# Altium PCB RELIA.PcbDoc (part 1 of 3)
Units mm, origin at the board's own origin, x right, y up, seen from the top; angles counter-clockwise.
Board outline 64.01 x 60 mm, 4 copper layers (Top Layer, GND, POWER, Bottom Layer), stack 1.457 mm thick; 143 components, 99 nets, 570 pads, 325 vias.
Unrouted connection lines stored in the file: 1.
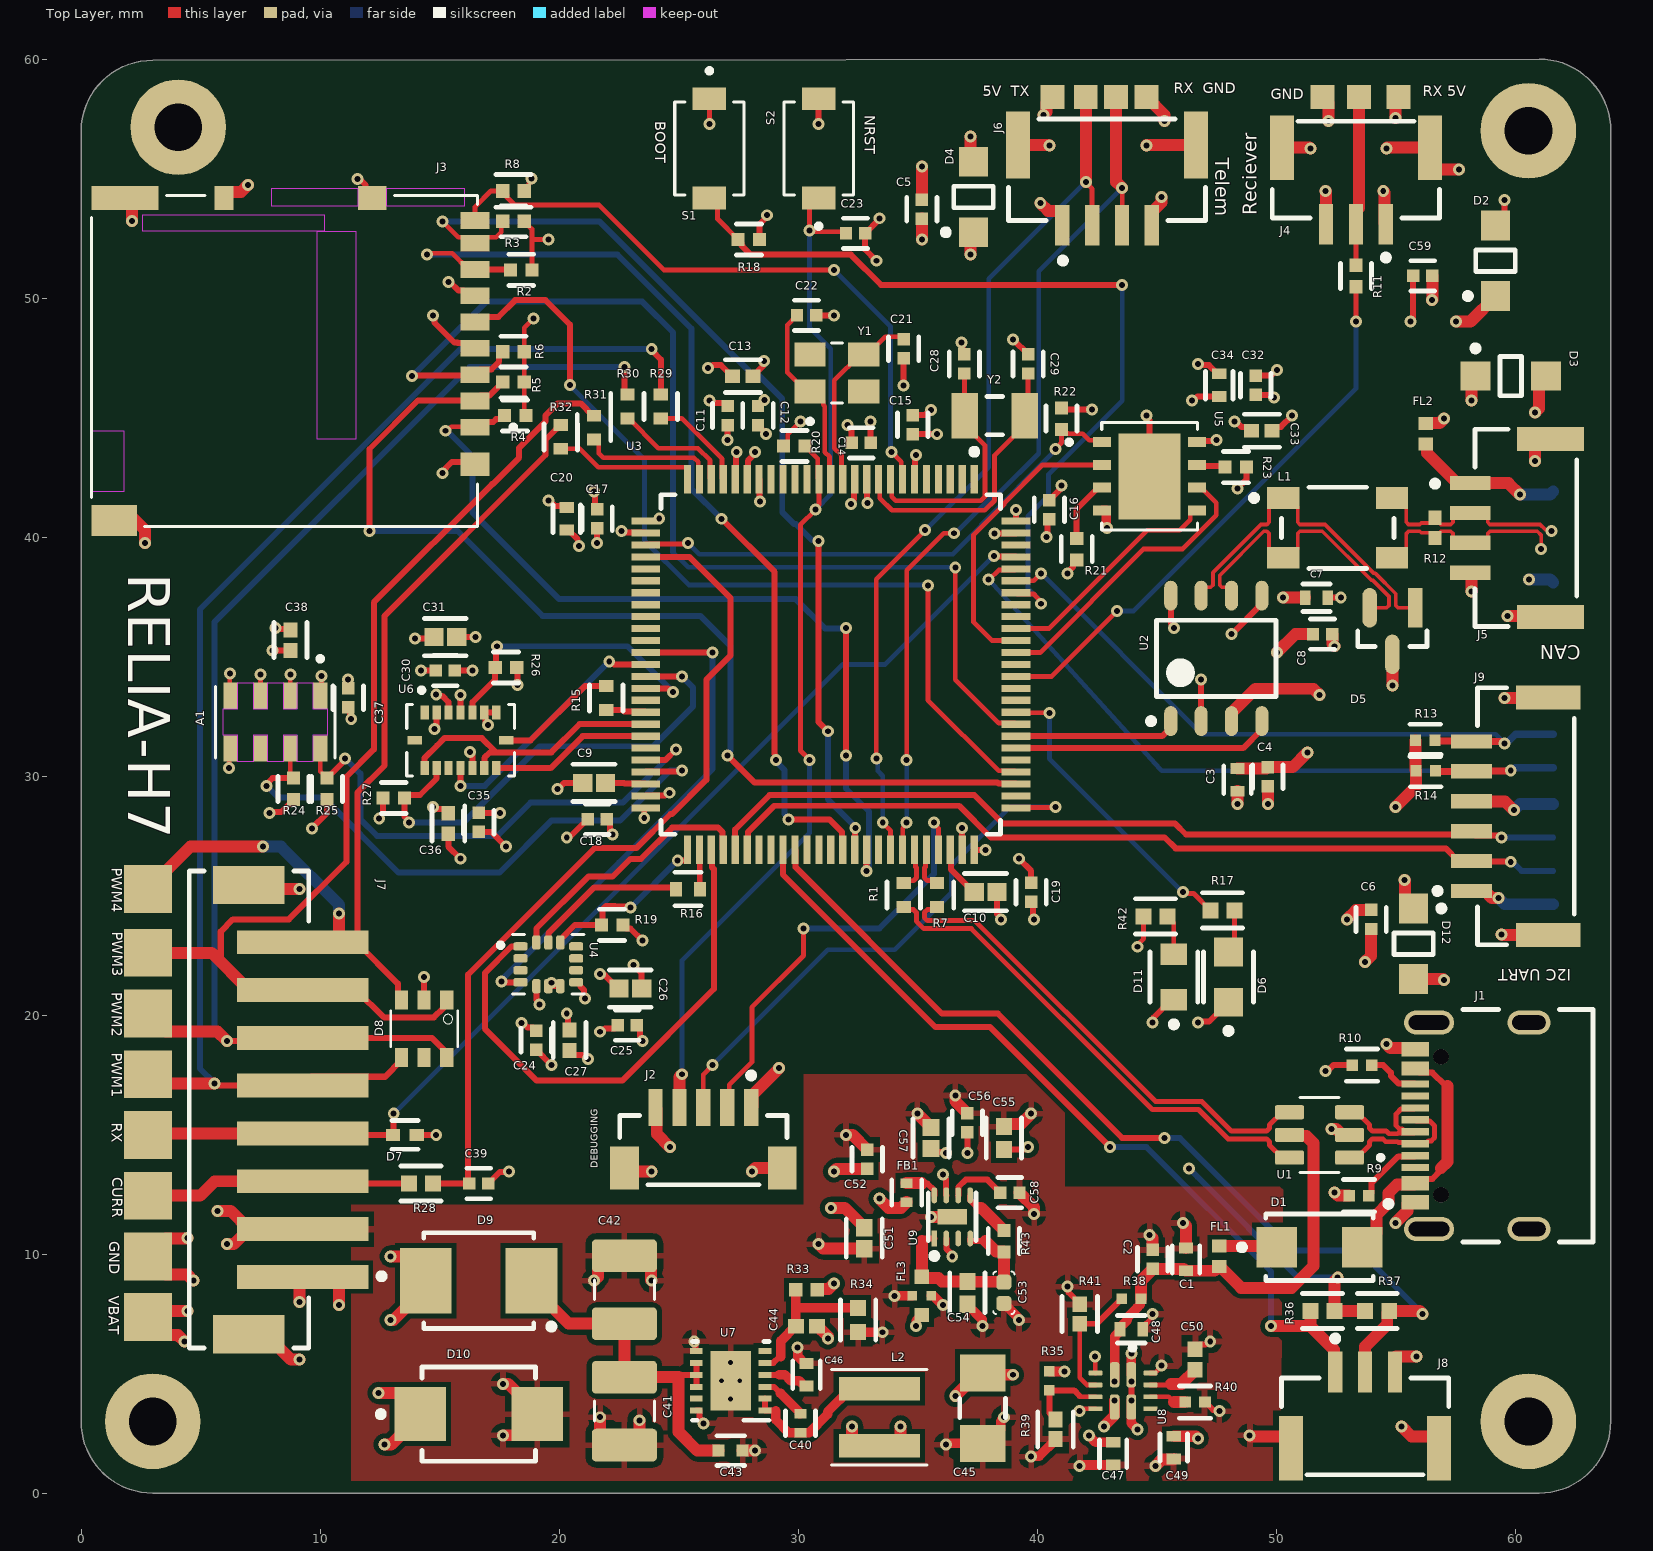
[diagram p0: Top Layer view]
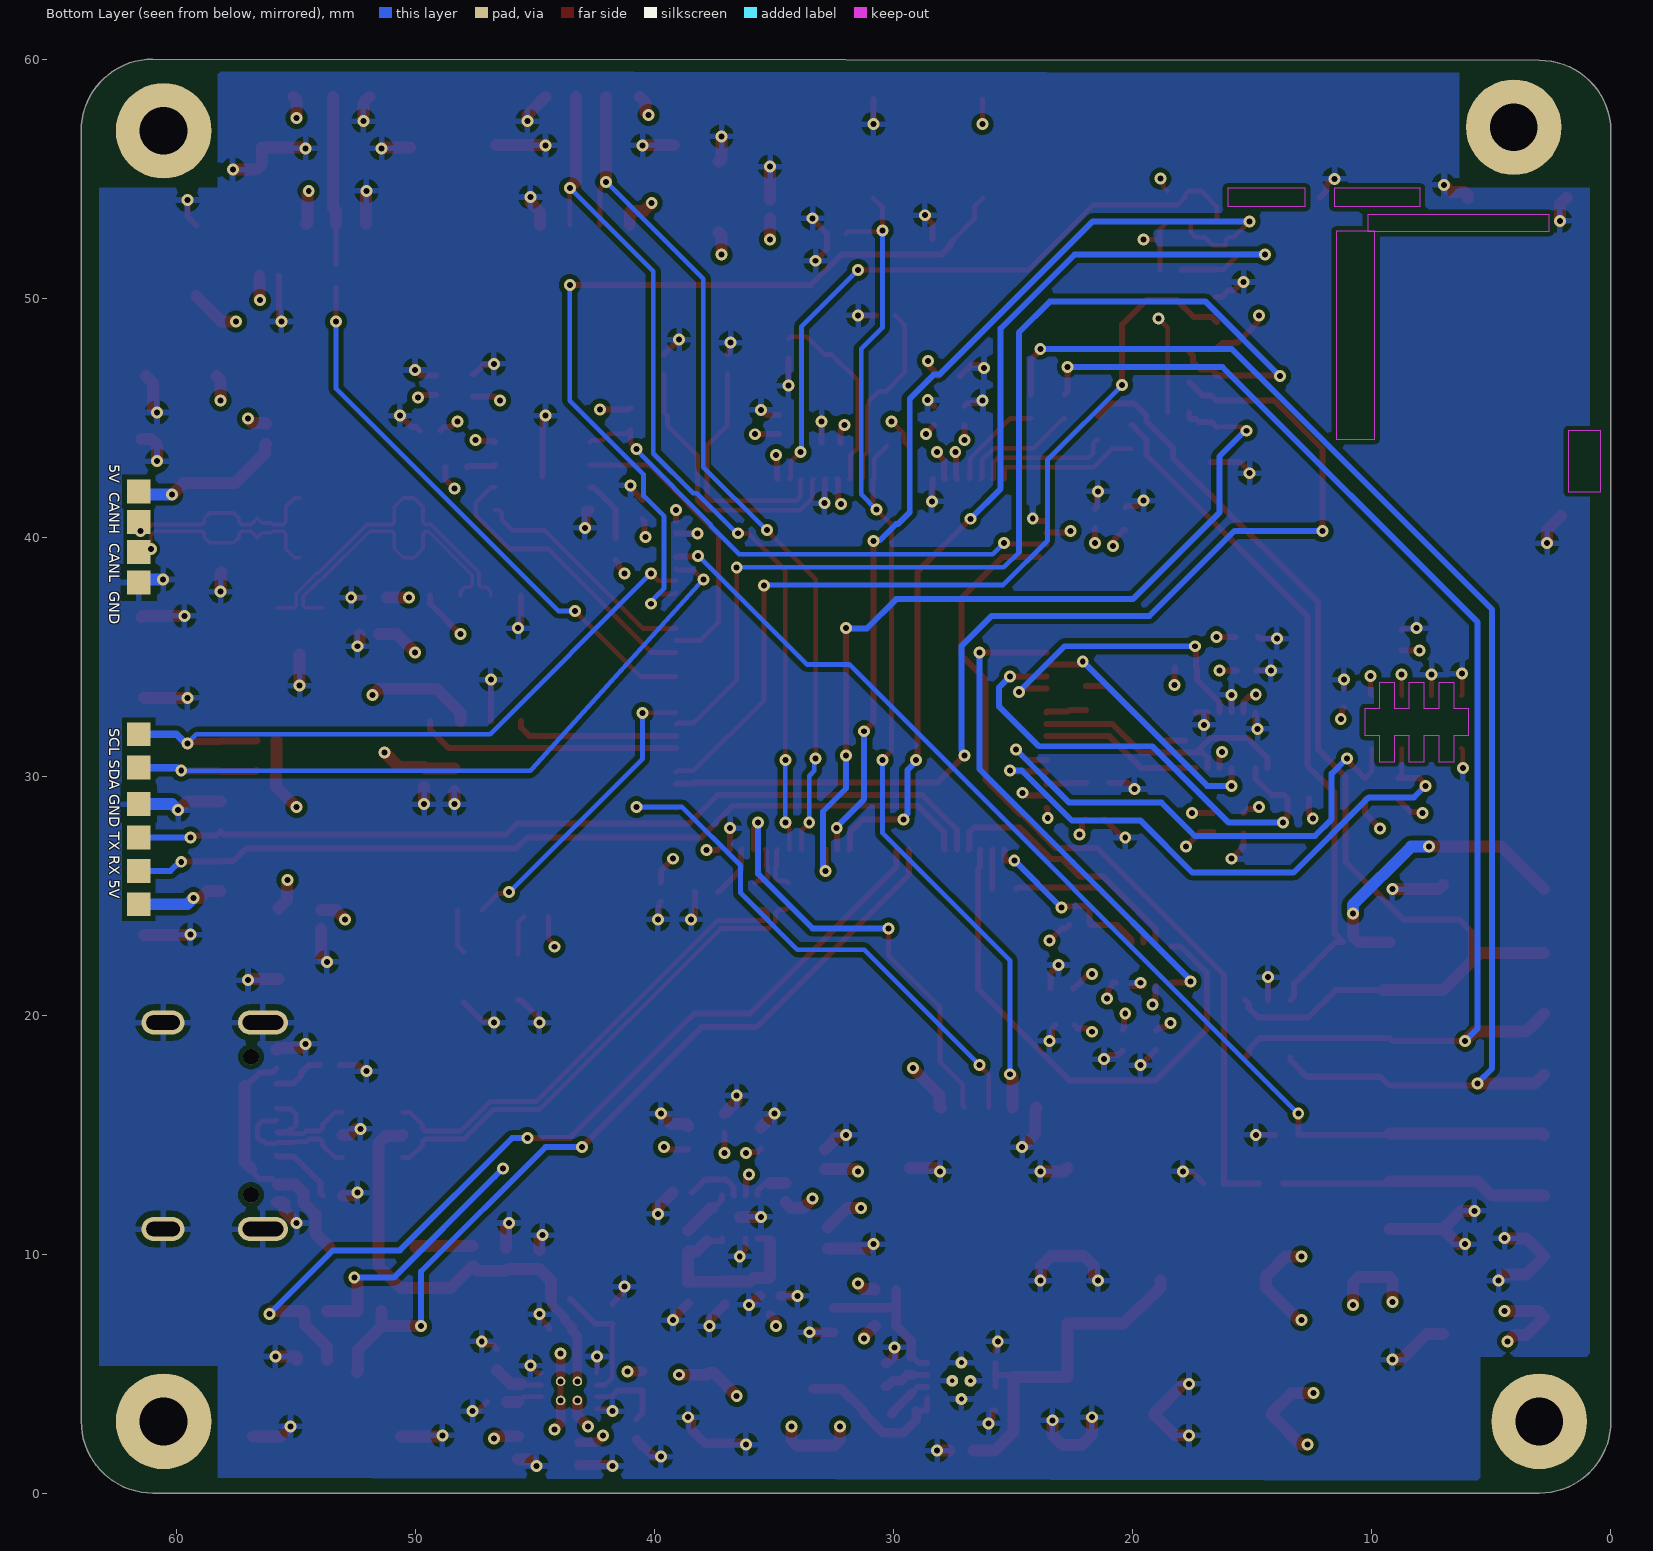
[diagram p1: Bottom Layer view, seen from below]
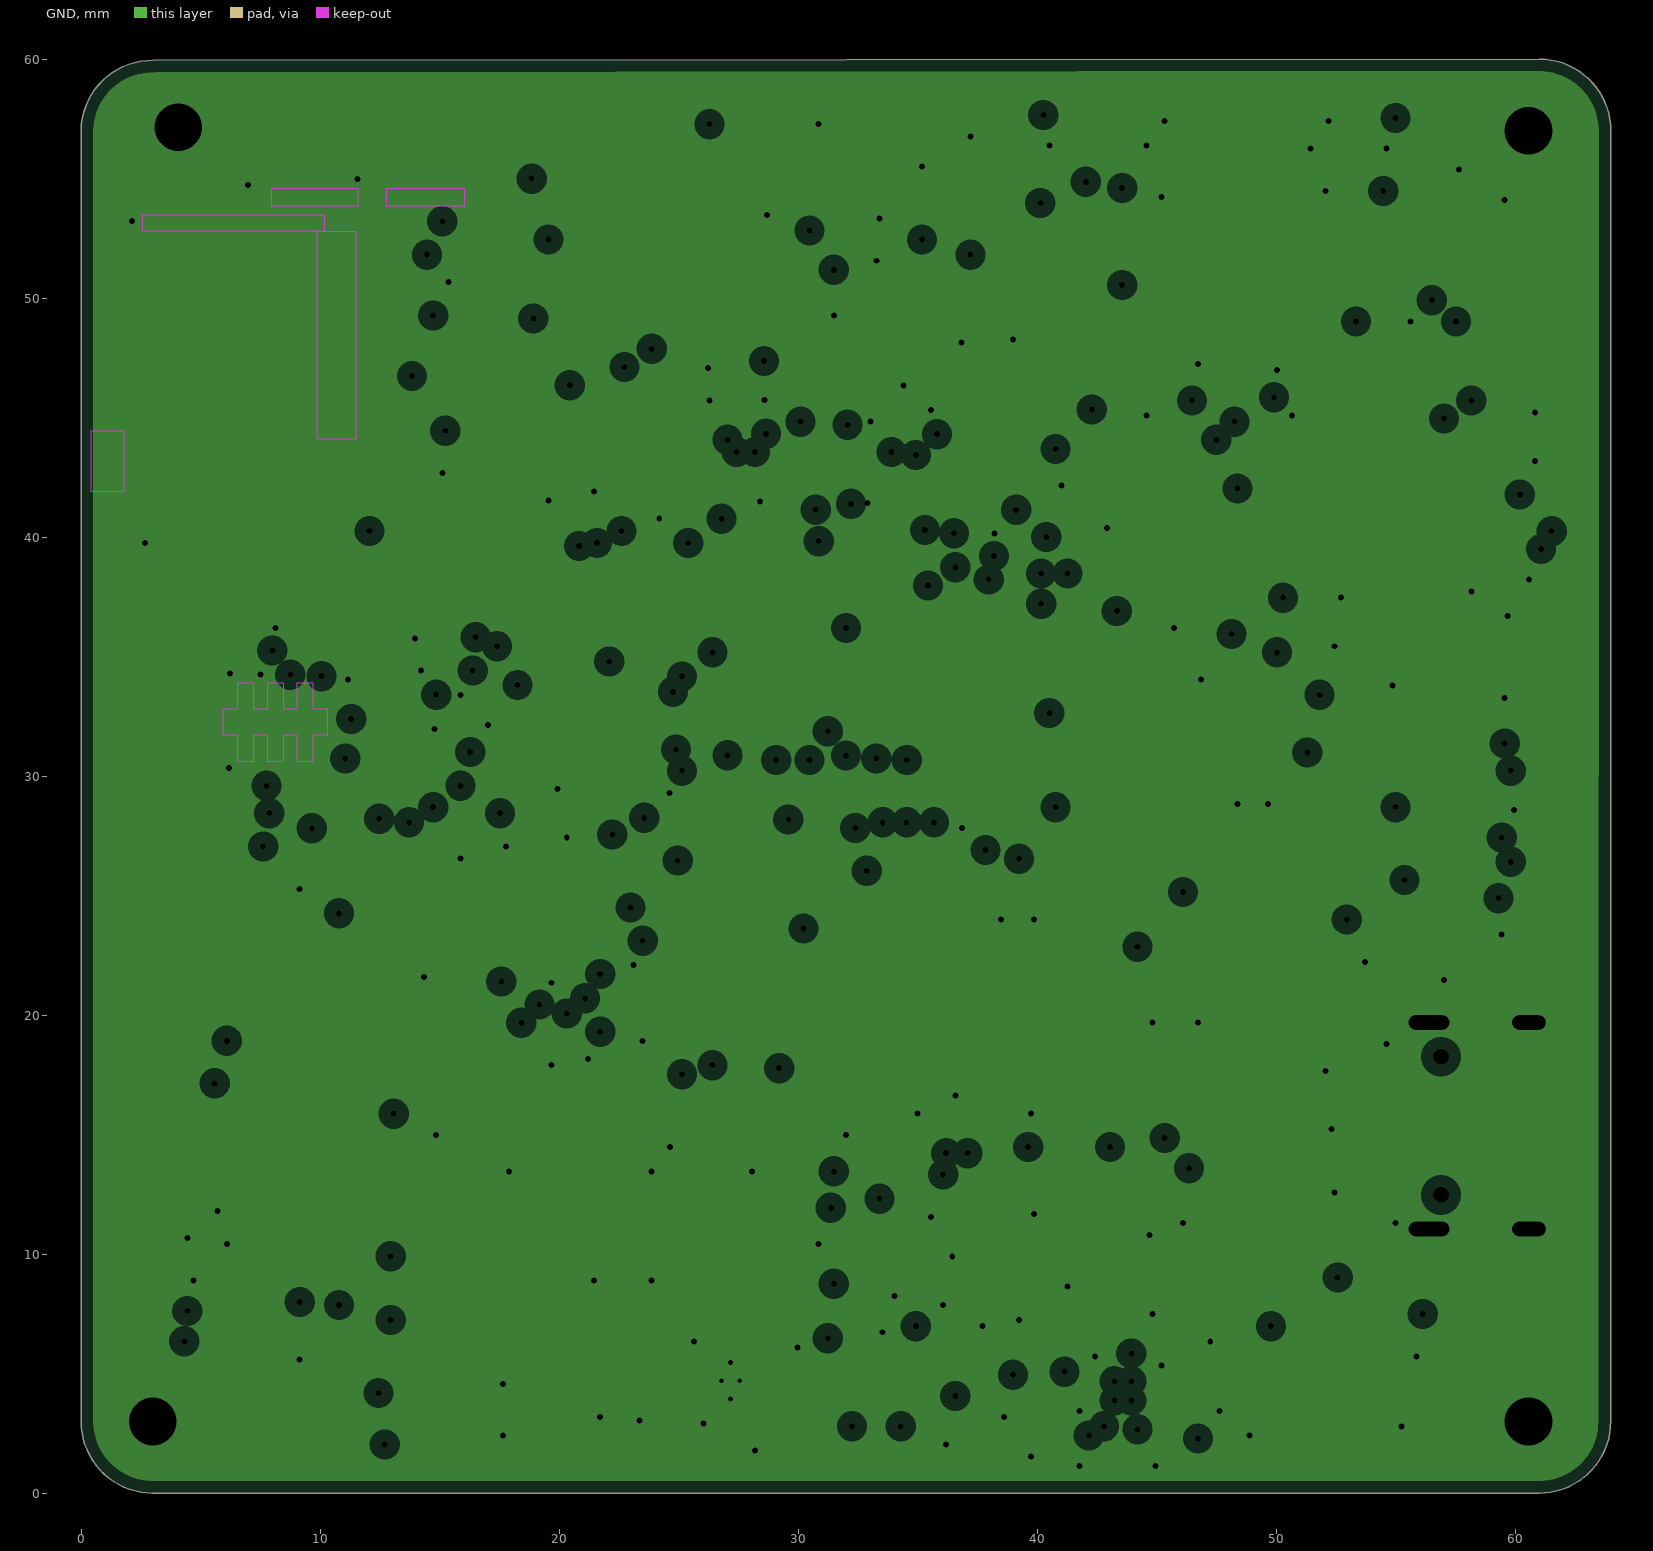
[diagram p2: GND, clearances drawn from the general rule]
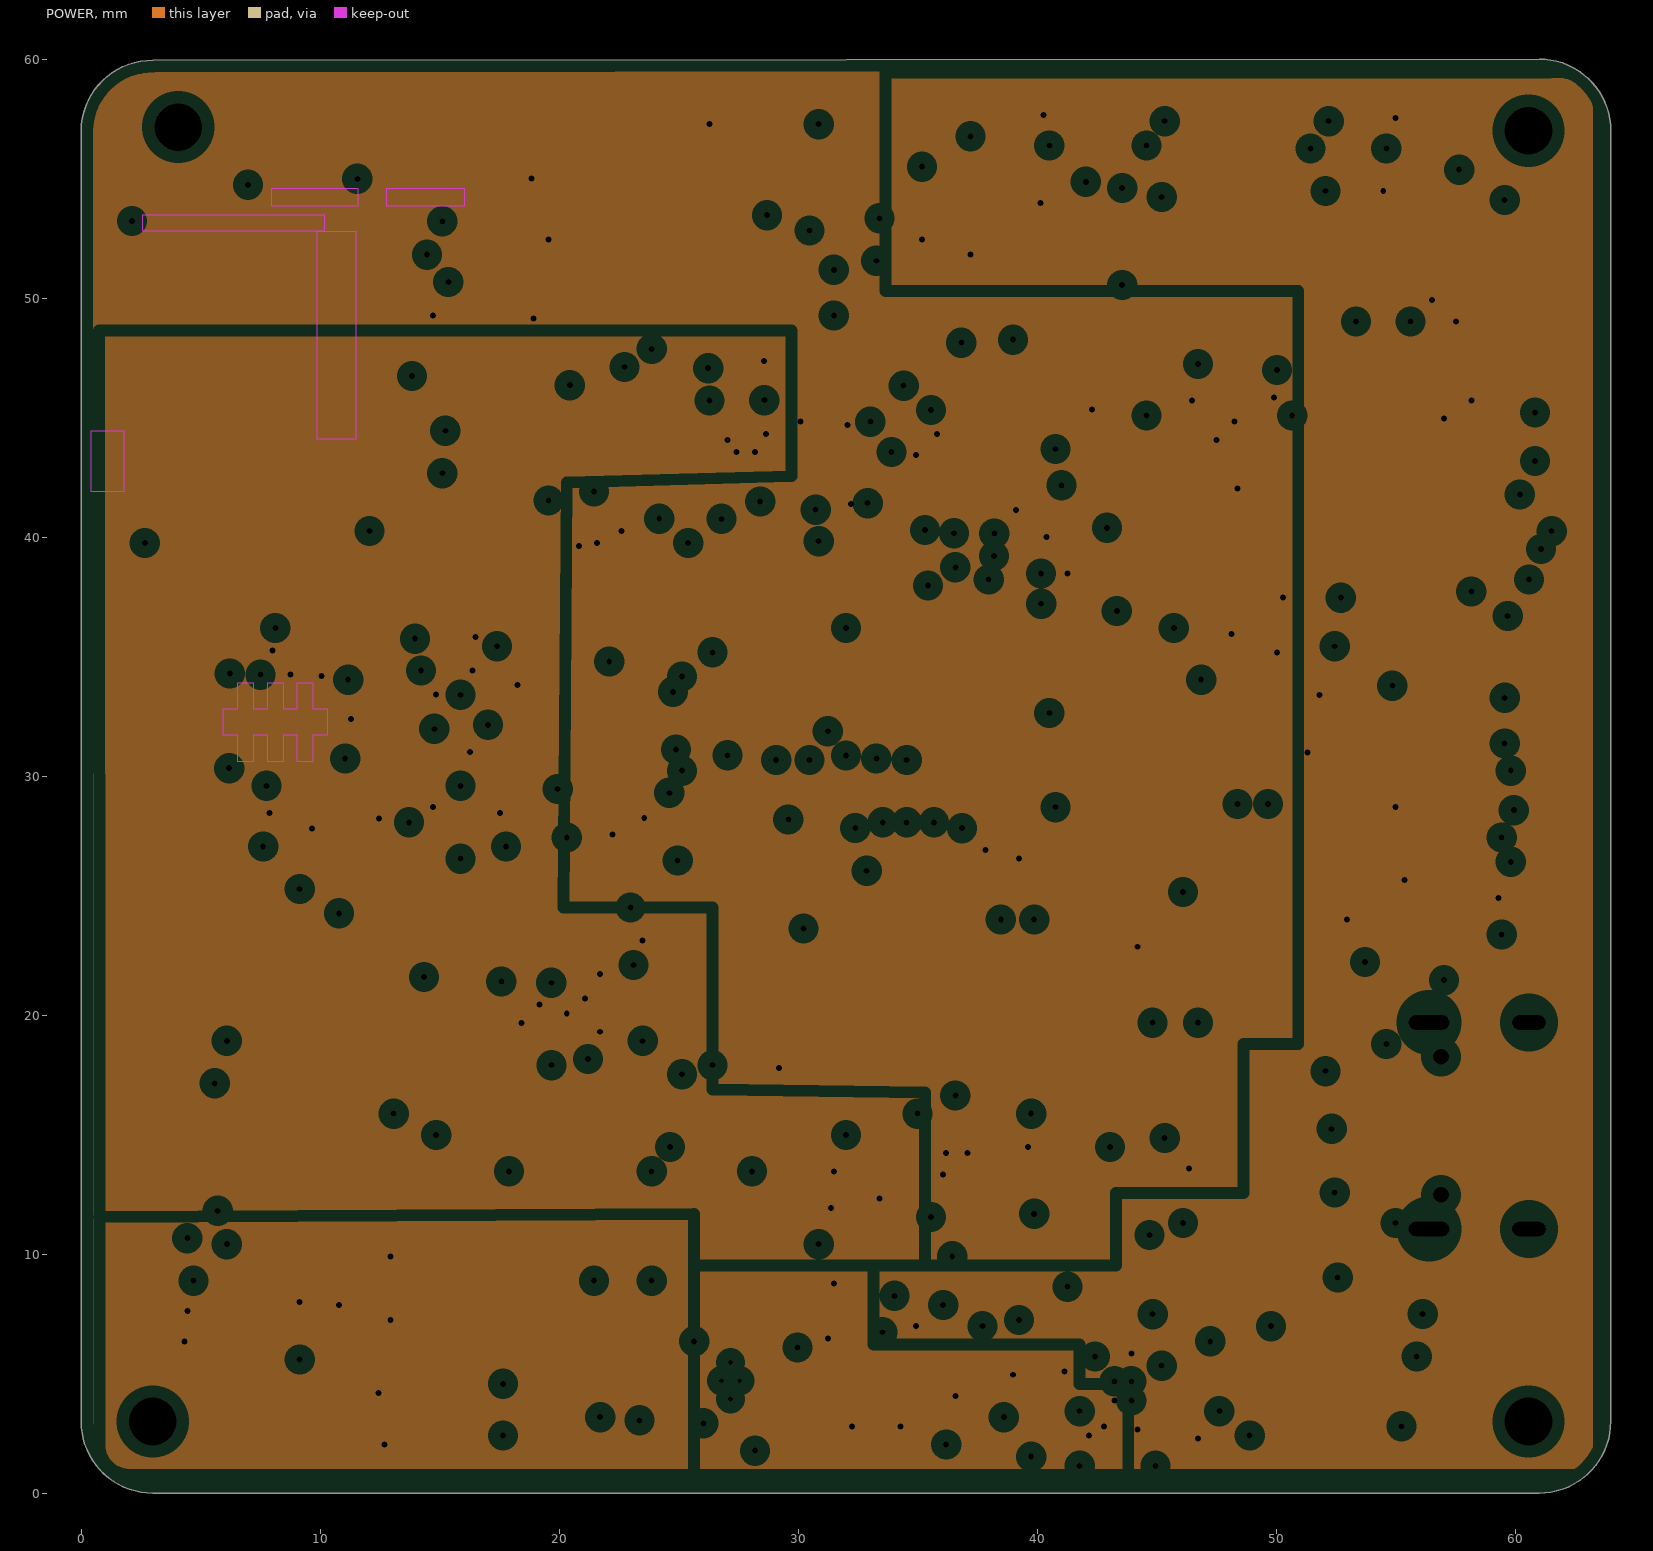
[diagram p3: POWER, clearances drawn from the general rule]
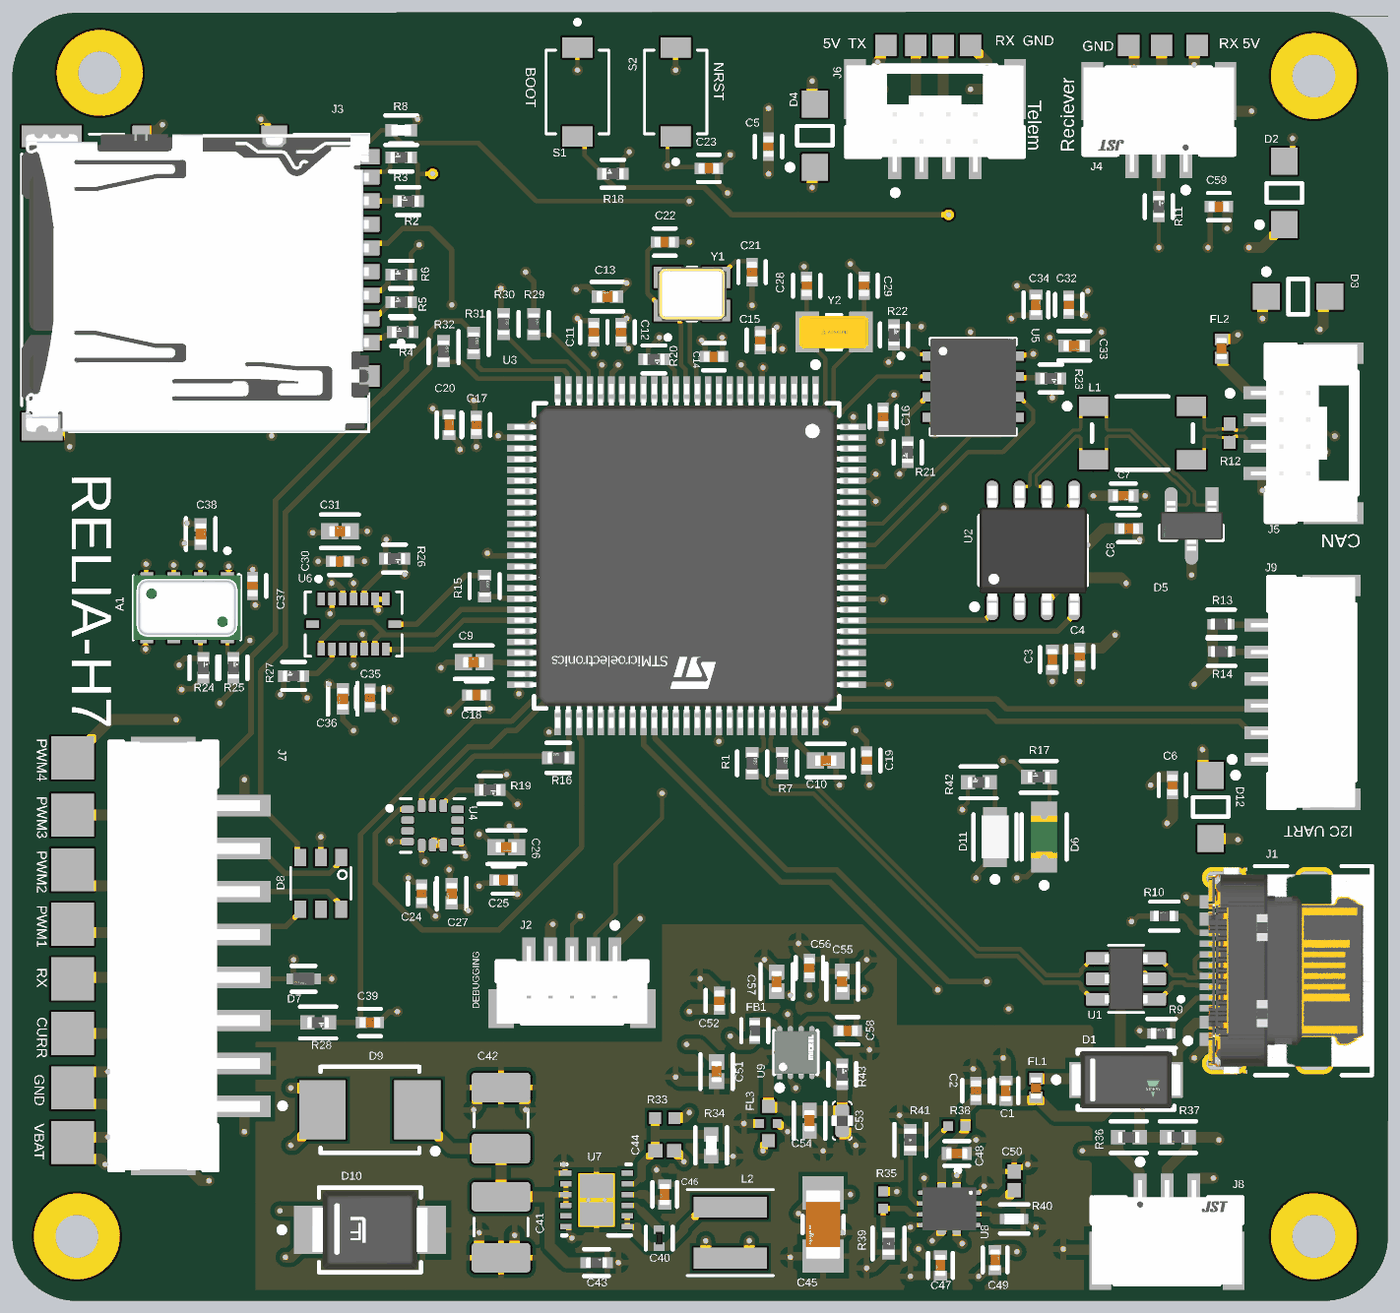
[diagram p5: 3D render of the assembled board from above, using the file's embedded part models]

## Layer stack, top to bottom
Top Solder: solder mask 0.01, Solder Resist, Dk 3.5
Top Layer: signal copper 0.035
Dielectric 2: prepreg 0.1803, PP-021, Dk 4.7
GND: plane copper 0.018, net GND
Dielectric 1: core 0.9906, Core-042, Dk 4.6
POWER: plane copper 0.018, net (Multiple Nets)
Dielectric 3: prepreg 0.1803, PP-021, Dk 4.7
Bottom Layer: signal copper 0.035
Bottom Solder: solder mask 0.01, Solder Resist, Dk 3.5

## Board outline
0,3 0,57 cw(c2.972,56.972) 3,59.944 61,60 cw(c61.004,56.996) 64.008,57 64,3 cw(c61,3) 61,0 3,0 cw(c3,3)

## Design rules (kind name [scope] priority, off if disabled: settings)
Clearance DIFF [InNetClass('USB') OR InNetClass('CAN')] p1: gap=0.127 ignorepadtopadclearanceinfootprint=TRUE
Clearance [All] p2: gap=0.2 ignorepadtopadclearanceinfootprint=TRUE
DiffPairsRouting [InDifferentialPairClass('CAN')] p1: maxlimit=0.254 minlimit=0.1 mostfreqgap=0.127 toplayer_mingap=0.127 toplayer_maxgap=0.127 toplayer_minwidth=0.154 toplayer_maxwidth=0.154 toplayer_prefwidth=0.154 impedanceprofiledriven=TRUE impedanceprofileid={CBBA4AEC-A577-42E8-9D77-0539E0AFB0D8} impedanceprofilevalue=100.000000 maxuncoupledlength=12.7
HoleToHoleClearance [All] p1: gap=0.3 allowstackedmicrovias=TRUE
MatchedLengths [InDifferentialPair('No Differential Pair')] p1: tolerance=0.5 checknetsindiffpair=FALSE checkdiffpairvsdiffpair=TRUE checkxsignals=TRUE checkothers=TRUE
MinimumSolderMaskSliver C44 [InComponent('C44')] p1: minsoldermaskwidth=0.016
MinimumSolderMaskSliver [All] p2: minsoldermaskwidth=0.025
PlaneClearance [All] p1: clearance=0.508
PlaneConnect "Powerplane issue" [InComponent('U8')] p1: planeconnectstyle=Direct reliefexpansion=0.508 reliefentries=4 reliefconductorwidth=0.254 reliefairgap=0.254
PlaneConnect PlaneConnect_1 [All] p2: planeconnectstyle=Relief reliefexpansion=0.508 reliefentries=4 reliefconductorwidth=0.254 reliefairgap=0.254
PolygonConnect [All] p1: connectstyle=Relief reliefconductorwidth=0.254 reliefentries=4 polygonreliefangle="90 Angle" airgapwidth=0.254
RoutingVias [All] p1: holewidth=0.25 width=0.5 viastyle="Through Hole" minholewidth=0.25 minwidth=0.5 maxholewidth=0.25 maxwidth=0.5
SilkToSilkClearance [All] p1: silktosilkclearance=0.016
SilkToSolderMaskClearance [IsPad] p1: minsilkscreentomaskgap=0.002 clearancetoexposedcopper=TRUE
SolderMaskExpansion [All] p1: expansion=0.102 istentingtop=FALSE
SupplyNets "Schematic Supply Nets_8" [InNet('GND')] p1: voltage=0.000
SupplyNets "Schematic Supply Nets_7" [InNet('VDD_5V')] p2: voltage=0.000
SupplyNets "Schematic Supply Nets_5" [InNet('VBAT')] p3: voltage=0.000
SupplyNets "Schematic Supply Nets_4" [InNet('+3V3_ANALOG')] p4: voltage=0.000
SupplyNets "Schematic Supply Nets_3" [InNet('BEC_5V')] p5: voltage=0.000
SupplyNets "Schematic Supply Nets_2" [InNet('+3V3_MAIN')] p6: voltage=0.000
SupplyNets "Schematic Supply Nets" [InNet('VBUS')] p7: voltage=0.000
Width [All] p1: maxlimit=0.5 minlimit=0.2 preferedwidth=0.25
23 further rules are at their usual default settings.

## Classes and differential pairs
net class CAN: CAN1_N CAN1_P CAN2_N CAN2_P
net class USB: USB1_N USB1_P USB4_N USB4_P USB_N USB_P
differential pair class USB: USB USB1 USB4
differential pair class CAN: CAN1 CAN2
component class Designator: C39 D7 D8 J7 R28 R29 R30 R31 R32
differential pair CAN2: +CAN2_P -CAN2_N
differential pair CAN1: +CAN1_P -CAN1_N
differential pair USB4: +USB4_P -USB4_N
differential pair USB: +USB_P -USB_N
differential pair USB1: +USB1_P -USB1_N

## Components (designator, comment, footprint, x,y, rotation, side; value= is the part's Value field where it differs from the comment)
A1 "MS561101BA03-50" XDCR_MS561101BA03-50 8.128,32.258 r270 top
C1 "4.7uF" FP-GRT155-0_15-MFG 46.228,9.779 r90 top
C2 "0.1uF" FP-C0402-BB-MFG 44.831,9.779 r90 top value="0.10 μF"
C3 "4.7uF" FP-GRT155-0_15-MFG 48.387,29.845 r270 top
C4 "0.1uF" FP-C0402-BB-MFG 49.657,29.972 r270 top value="0.10 μF"
C5 "0.1uF" FP-C0402-BB-MFG 35.179,53.721 r90 top value="0.10 μF"
C6 "0.1uF" FP-C0402-BB-MFG 53.975,24.003 r270 top value="0.10 μF"
C7 "4.7uF" FP-GRT155-0_15-MFG 51.689,37.465 r0 top
C8 "0.1uF" FP-C0402-BB-MFG 51.943,35.941 r0 top value="0.10 μF"
C9 "2.2uF" FP-GRM155-0_15-IPC_A 21.463,29.718 r180 top
C10 "2.2uF" FP-GRM155-0_15-IPC_A 37.846,25.146 r0 top
C11 "0.1uF" FP-C0402-BB-MFG 27.051,45.085 r90 top value="0.10 μF"
C12 "0.1uF" FP-C0402-BB-MFG 28.321,45.085 r90 top value="0.10 μF"
C13 "1uF" FP-GRM155-0_05-IPC_B 27.686,46.736 r180 top
C14 "0.1uF" FP-C0402-BB-MFG 32.639,43.942 r0 top value="0.10 μF"
C15 "0.1uF" FP-C0402-BB-MFG 34.798,44.704 r90 top value="0.10 μF"
C16 "0.1uF" FP-C0402-BB-MFG 40.513,41.148 r90 top value="0.10 μF"
C17 "0.1uF" FP-C0402-BB-MFG 21.59,40.767 r90 top value="0.10 μF"
C18 "0.1uF" FP-C0402-BB-MFG 21.59,28.194 r180 top value="0.10 μF"
C19 "0.1uF" FP-C0402-BB-MFG 39.751,25.146 r270 top value="0.10 μF"
C20 "4.7uF" FP-GRT155-0_15-MFG 20.32,40.767 r90 top
C21 "18pF" FP-C0402-BB-MFG 34.417,47.879 r90 top value="18 pF"
C22 "18pF" FP-C0402-BB-MFG 30.353,49.276 r180 top value="18 pF"
C23 "100nF" FP-C0402-BB-MFG 32.404,52.705 r0 top value="0.10 μF"
C24 "0.1uF" FP-C0402-BB-MFG 19.042,18.949 r270 top value="0.10 μF"
C25 "0.1uF" FP-C0402-BB-MFG 22.852,19.584 r0 top value="0.10 μF"
C26 "2.2uF" FP-GRM155-0_15-IPC_A 22.979,21.108 r0 top
C27 "1uF" FP-GRM155-0_05-IPC_B 20.439,18.949 r270 top
C28 "12pF" FP-C0402-BB-MFG 36.957,47.244 r270 top value="12 pF"
C29 "12pF" FP-C0402-BB-MFG 39.624,47.244 r270 top value="12 pF"
C30 "0.1uF" FP-C0402-BB-MFG 15.24,34.417 r180 top value="0.10 μF"
C31 "2.2uF" FP-GRM155-0_15-IPC_A 15.24,35.814 r180 top
C32 "0.1uF" FP-C0402-BB-MFG 49.149,46.355 r90 top value="0.10 μF"
C33 "1uF" FP-GRM155-0_05-IPC_B 49.403,44.45 r0 top
C34 "4.7uF" FP-GRT155-0_15-MFG 47.625,46.355 r90 top
C35 "0.1uF" FP-C0402-BB-MFG 16.637,28.067 r270 top value="0.10 μF"
C36 "1uF" FP-GRM155-0_05-IPC_B 15.367,28.019 r270 top
C37 "0.1uF" FP-C0402-BB-MFG 11.176,33.274 r90 top value="0.10 μF"
C38 "1uF" FP-GRM155-0_05-IPC_B 8.763,35.687 r90 top
C39 "0.1uF" FP-C0402-BB-MFG 16.637,12.954 r0 top value="0.10 μF"
C40 "100nF" FP-GRM15-MFG 30.099,2.921 r90 top value=0.10μF
C41 "4.7uF" CAPC3225X270N 22.733,3.429 r90 top
C42 "4.7uF" CAPC3225X270N 22.733,8.509 r270 top
C43 "100nF" FP-CS0402-CA-MFG 27.178,1.778 r0 top
C44 "47pF" CAPC1005X55X25NL05T10 30.353,6.985 r0 top
C45 "47uF" FP-GRM31C-0_2-e0_3_0_8-IPC_A 37.719,3.556 r270 top
C46 "4.7uF" FP-GRT155-0_15-MFG 30.353,4.953 r270 top
C47 "4.7uF" FP-GRT155-0_15-MFG 43.18,1.651 r270 top
C48 "4.7uF" FP-GRT155-0_15-MFG 43.942,6.858 r0 top
C49 "4.7uF" FP-GRT155-0_15-MFG 45.72,1.905 r90 top
C50 "10nF" CAPC1005X60X30NL05T10 46.609,5.588 r270 top
C51 "2.2uF" FP-GRM155-0_2-IPC_B 32.766,10.668 r270 top
C52 "0.1uF" FP-C0402-BB-MFG 32.893,13.97 r90 top value="0.10 μF"
C53 "10uF" C0402 38.608,8.382 r180 top
C54 "1uF" FP-GRM155-0_1-IPC_A 37.084,8.382 r270 top
C55 "1uF" FP-GRM155-0_1-IPC_A 38.608,14.859 r90 top
C56 "0.1uF" FP-C0402-BB-MFG 37.084,15.494 r90 top value="0.10 μF"
C57 "2.2uF" FP-GRM155-0_2-IPC_B 35.56,14.859 r90 top
C58 "0.1uF" FP-C0402-BB-MFG 38.862,12.573 r0 top value="0.10 μF"
C59 "0.1uF" FP-C0402-BB-MFG 56.134,50.927 r180 top value="0.10 μF"
D1 "SSA34HE3_A/I" FP-95400-MFG 51.816,10.287 r0 top
D2 "SMF5.0AT1G" ONSC-SOD-123FL-2-498_V 59.182,51.562 r90 top
D3 "SMF5.0AT1G" ONSC-SOD-123FL-2-498_V 59.817,46.736 r0 top
D4 "SMF5.0AT1G" ONSC-SOD-123FL-2-498_V 37.338,54.229 r90 top
D5 "PESD2CANFD24V-TR" FP-SOT23-IPC_A 54.864,36.068 r270 top
D6 "LED GREEN" FP-LTST-C171GKT-MFG 48.006,21.59 r90 top
D7 "TPD1E05U06QDPYRQ1" FP-DPY0002A-MFG 13.55,14.986 r0 top
D8 "PESD5V0S4UD" SOT457 14.351,19.431 r180 top
D9 "MBRS360BT3G" ONSC-SMB-2-403A-03_H_V 16.637,8.89 r180 top
D10 "SMBJ26A" FP-SMBJ-MFG 16.637,3.302 r0 top
D11 "LED RED" FP-SML-LXT0805IW-TR-MFG 45.72,21.59 r90 top
D12 "SMF5.0AT1G" ONSC-SOD-123FL-2-498_V 55.753,22.987 r270 top
FB1 "600 Ohm" FP-BLM15-0_05-MFG 34.544,12.573 r270 top
FL1 "Ferrite bead" BEADC1005X55N 47.625,9.906 r270 top
FL2 "Ferrite Bead" BEADC1005X55N 56.261,44.323 r90 top
FL3 "KNH16C104DA5TS" FIL_KNH16C104DA5TS 35.179,8.255 r90 top
J1 "USB4105-GF-A" FP-USB4105-GF-A-MFG 59.414,15.369 r90 top
J2 "BM05B-SRSS-TBT(LF)(SN)" FP-BM05B-SRSS-TBT_LF_SN-MFG 26.035,14.351 r180 top
J3 "DM3AT-SF-PEJM5" HRS_DM3AT-SF-PEJM5 8.509,47.371 r270 top locked
J4 "SM03B-GHS-TB(LF)(SN)" FP-SM03B-GHS-TB_LF_SN-MFG 53.34,55.372 r180 top
J5 "BM04B-GHS-TBT(LF)(SN)" FP-BM04B-GHS-TBT_LF_SN-MFG 60.452,40.386 r90 top
J6 "BM04B-GHS-TBT(LF)(SN)" FP-BM04B-GHS-TBT_LF_SN-MFG 42.926,55.372 r180 top
J7 "B8B-PH-SM4-TB(LF)(SN)" FP-B8B-PH-SM4-TB_LF_SN-MFG 7.021,16.049 r90 top
J8 "SM03B-GHS-TB(LF)(SN)" FP-SM03B-GHS-TB_LF_SN-MFG 53.721,2.794 r0 top
J9 "SM06B-GHS-TB(LF)(SN)" FP-SM06B-GHS-TB_LF_SN-MFG 60.452,28.321 r90 top
L1 "Common Choke" TDK-ACT45B-510-2P-TL003-4_V 52.578,40.386 r0 top
L2 "3.3uH" IND_XAL4030-332MEB 33.401,3.175 r270 top
R1 "22Ω" FP-RMCF0402-MFG 34.417,25.019 r90 top
R2 "10K" FP-MCS0402-MFG 18.415,51.181 r180 top
R3 "10K" FP-MCS0402-MFG 18.092,53.213 r180 top
R4 "10K" FP-MCS0402-MFG 18.161,45.085 r180 top
R5 "10K" FP-MCS0402-MFG 18.092,46.482 r180 top
R6 "10K" FP-MCS0402-MFG 18.092,47.752 r180 top
R7 "22Ω" FP-RMCF0402-MFG 35.814,25.019 r90 top
R8 "47K" FP-CRCW0402-e3-IPC_B 18.09,54.483 r0 top
R9 "5.1k" FP-RN73R1E-IPC_C 53.467,12.446 r180 top
R10 "5.1k" FP-RN73R1E-IPC_C 53.594,17.907 r180 top
R11 "10K" FP-MCS0402-MFG 53.34,50.927 r90 top
R12 "120 Ohm" RESC1005X40X25NL05T10 56.642,40.386 r90 top
R13 "4.7K" FP-CRCW0402-Pe3-IPC_C 56.24,31.496 r0 top
R14 "4.7K" FP-CRCW0402-Pe3-IPC_C 56.261,30.226 r0 top
R15 "22 Ω" FP-RMCF0402-MFG 21.971,33.266 r90 top
R16 "22 Ω" FP-RMCF0402-MFG 25.4,25.273 r180 top
R17 "1k" FP-MCS0402-IPC_A 47.752,24.384 r180 top
R18 "10K" FP-MCS0402-MFG 27.94,52.451 r180 top
R19 "10K" FP-MCS0402-MFG 22.217,23.775 r0 top
R20 "10K" FP-MCS0402-MFG 29.845,43.815 r0 top
R21 "10K" FP-MCS0402-MFG 41.656,39.497 r270 top
R22 "10K" FP-MCS0402-MFG 41.021,44.958 r90 top
R23 "10K" FP-MCS0402-MFG 48.318,42.926 r0 top
R24 "10K" FP-MCS0402-MFG 8.89,29.464 r90 top
R25 "10K" FP-MCS0402-MFG 10.287,29.464 r90 top
R26 "10K" FP-MCS0402-MFG 17.78,34.544 r0 top
R27 "10K" FP-MCS0402-MFG 13.081,29.083 r180 top
R28 "100 Ohm" FP-MCS0402-IPC_A 14.224,12.954 r0 top
R29 "33 Ohm" FP-RMCF0402-MFG 24.257,45.466 r90 top
R30 "33 Ohm" FP-RMCF0402-MFG 22.86,45.466 r90 top
R31 "33 Ohm" FP-RMCF0402-MFG 21.463,44.577 r90 top
R32 "33 Ohm" FP-RMCF0402-MFG 20.066,44.196 r90 top
R33 "88.7k" RESC1005X40X25NL05T05 30.353,8.509 r0 top
R34 "22.1k" FP-CRCW0402-e3-IPC_A 32.512,7.239 r90 top
R35 "23.7K" RESC1005X40X25LL05T05 40.513,4.699 r90 top
R36 "4.7k" FP-TFCR0402-IPC_A 51.943,7.62 r0 top
R37 "4.7k" FP-TFCR0402-IPC_A 54.229,7.62 r180 top
R38 "23.7K" RESC1005X40X25LL05T05 43.942,8.128 r0 top
R39 "5K" FP-PNM0402-IPC_C 40.767,2.667 r270 top
R40 "51.1K" FP-RK73H1E-IPC_C 46.609,3.81 r0 top
R41 "5K" FP-PNM0402-IPC_C 41.783,7.493 r90 top
R42 "1k" FP-MCS0402-IPC_A 44.958,24.13 r180 top
R43 "10K" FP-MCS0402-MFG 38.608,10.541 r90 top value=10kR
S1 "TL1015AF160QG" SW_TL1015AF160QG 26.289,56.261 r270 top
S2 "TL1015AF160QG" SW_TL1015AF160QG 30.861,56.261 r90 top
U1 "USBLC6-2SC6" SOT95P280X145-6N 51.816,14.986 r180 top
U2 "TJA1051T/3,118" NXP-SOIC-8_L 47.498,34.925 r90 top
U3 "STM32H743VIT6" FP-LQFP100-1L-MFG 31.369,34.671 r270 top locked
U4 "ICM-42688-P" PQFN50P300X250X97-14N 19.55,22.124 r0 top
U5 "FM25V02A-DG" SON95P450X400X80-9N 44.704,42.545 r0 top
U6 "BMI088" PQFN50P450X300X100-16N 15.875,31.496 r0 top
U7 "LMR23625CFPDRRR" DRR0012D 27.178,4.699 r180 top
U8 "TPS2121RUXR" IC_TPS2121RUXR 43.592,4.278 r270 top
U9 "MIC5332-SSYMT-TR" FP-MIC5332-SSYMT-TR-IPC_C 36.449,11.557 r90 top
Y1 "25mhz" XTAL_SXT32412BB07-25.000MT 31.623,46.863 r90 top
Y2 "32khz" FP-ABS07-MFG 38.227,45.085 r0 top

## Footprints (in the part's own frame and the unit in brackets; to place one, negate y for a bottom-side part, rotate by r counter-clockwise, add the part's x,y. Pads: shape width x height; smd on the part's side, far side on the other; paste and mask are expansions set on the pad)
BEADC1005X55N [mm]
  rect 0.54x0.6 smd: 1(-0.432,0) 2(0.432,0)
  body extent -0.5,-0.25 0.5,0.25, height 0.55
C0402 [mil]
  rrect50% 25x25 smd: 1(0,17.5) 2(0,-17.5)
  silkscreen extent -18,-35 18,35, body extent -20,-10 20,10, height 22
CAPC1005X55X25NL05T10 [mm] "Chip Capacitor, 2-Leads, Body 1.00x0.50mm, IPC Medium Density"
  rect 0.66x0.62 smd: 1(-0.44,0) 2(0.44,0)
  body extent -0.53,-0.28 0.53,0.27, height 0.55
CAPC1005X60X30NL05T10 [mm] "Chip Capacitor, 2-Leads, Body 1.00x0.50mm, IPC Medium Density"
  rect 0.66x0.62 smd: 1(-0.43,0) 2(0.43,0)
  body extent -0.53,-0.28 0.53,0.27, height 0.6
CAPC3225X270N [mm]
  rrect25% 1.37x2.72 smd: 1(-1.42,0) 2(1.42,0)
  silkscreen extent -0.42,-1.25 0.42,1.25
DRR0012D [mm]
  rect 0.53x0.25 smd paste+0 mask+0.051: 1(-1.435,1.25) 2(-1.435,0.75) 3(-1.435,0.25) 4(-1.435,-0.25) 5(-1.435,-0.75) 6(-1.435,-1.25) 7(1.435,-1.25) 8(1.435,-0.75) 9(1.435,-0.25) 10(1.435,0.25) 11(1.435,0.75) 12(1.435,1.25)
  rect 1.7x2.5 smd paste-1.237 mask+0.051: 13(0,0)
  round 0.5 / inner round 1.524 / far side round 0.5 hole 0.203 paste-2539.97 mask+0.051: V(-0.381,0) V(0,0.762) V(0.381,0)
  round 0.5 hole 0.203 paste-2539.97 mask+0.051: V(0,-0.762)
  silkscreen extent -1.6,-1.65 1.6,1.65
FIL_KNH16C104DA5TS [mm]
  rect 0.6x0.6 smd: 1(-0.8,0) 2(0.8,0)
  rect 0.4x0.4 smd: 3(0,-0.4) 4(0,0.4)
FP-95400-MFG [mm]
  rect 1.7x1.68 smd paste+0 mask+0: 1(-1.79,0) 2(1.79,0)
  silkscreen extent -3.37,-1.4 2.25,1.4, body extent -2.74,-1.5 2.74,1.5, height 0.25
FP-ABS07-MFG [mm]
  rect 1.1x1.9 smd paste+0 mask+0: 1(-1.25,0) 2(1.25,0)
  silkscreen extent -0.33,-0.8 0.33,0.8, body extent -1.9,-1.05 1.9,1.05, height 0.25
FP-B8B-PH-SM4-TB_LF_SN-MFG [mm]
  rect 1x5.5 smd paste+0 mask+0: 1(-7,-2.25) 2(-5,-2.25) 3(-3,-2.25) 4(-1,-2.25) 5(1,-2.25) 6(3,-2.25) 7(5,-2.25) 8(7,-2.25)
  rect 1.6x3 smd paste+0 mask+0: 9(-9.4,0) 10(9.4,0)
  silkscreen extent -9.97,-5.68 9.97,2.5, body extent -10.3,-5.1 10.3,2.6, height 0.25
FP-BLM15-0_05-MFG [mm]
  rect 0.4x0.5 smd paste+0 mask+0: 1(-0.4,0) 2(0.4,0)
  silkscreen extent -0.53,-0.63 0.52,0.63, body extent -0.7,-0.38 0.7,0.38, height 0.25
FP-BM04B-GHS-TBT_LF_SN-MFG [mm]
  rect 0.6x1.7 smd paste+0 mask+0: 1(1.875,2.325) 2(0.625,2.325) 3(-0.625,2.325) 4(-1.875,2.325)
  rect 1x2.8 smd paste+0 mask+0: 5(-3.725,-1.025) 6(3.725,-1.025)
  silkscreen extent -4.13,-2.12 4.13,3.92, body extent -4.33,-2.52 4.33,3.27, height 0.25
FP-BM05B-SRSS-TBT_LF_SN-MFG [mm]
  rect 0.6x1.55 smd paste+0 mask+0: 1(-2,-1.775) 2(-1,-1.775) 3(0,-1.775) 4(1,-1.775) 5(2,-1.775)
  rect 1.2x1.8 smd paste+0 mask+0: 6(-3.3,0.75) 7(3.3,0.75)
  silkscreen extent -3.5,-3.25 3.5,1.45, body extent -4,-2.65 4,1.75, height 0.25
FP-C0402-BB-MFG [mm]
  rect 0.52x0.52 smd paste+0 mask+0: 1(-0.4,0) 2(0.4,0)
  silkscreen extent -0.5,-0.64 0.5,0.64, body extent -0.8,-0.4 0.8,0.4, height 0.25
FP-CRCW0402-e3-IPC_A [mm]
  rect 0.668x0.672 smd paste+0 mask+0: 1(-0.502,0) 2(0.502,0)
  silkscreen extent -0.84,-0.74 0.84,0.74, body extent -1.04,-0.54 1.04,0.54, height 0.25
FP-CRCW0402-e3-IPC_B [mm]
  rect 0.568x0.572 smd paste+0 mask+0: 1(-0.452,0) 2(0.452,0)
  silkscreen extent -0.74,-0.69 0.74,0.69, body extent -0.89,-0.44 0.89,0.44, height 0.25
FP-CRCW0402-Pe3-IPC_C [mm]
  rect 0.468x0.472 smd paste+0 mask+0: 1(-0.402,0) 2(0.402,0)
  silkscreen extent -0.64,-0.67 0.64,0.67, body extent -0.74,-0.38 0.74,0.38, height 0.25
FP-CS0402-CA-MFG [mm]
  rect 0.5x0.5 smd paste+0 mask+0: 1(-0.5,0) 2(0.5,0)
  silkscreen extent -0.58,-0.63 0.58,0.63, body extent -0.87,-0.48 0.87,0.48, height 0.25
FP-DPY0002A-MFG [mm]
  rect 0.6x0.5 smd paste+0 mask+0: 1(-0.5,0) 2(0.5,0)
  silkscreen extent -0.56,-0.6 0.55,0.6, body extent -0.9,-0.45 0.9,0.45, height 0.25
FP-GRM15-MFG [mm]
  rect 0.4x0.5 smd paste+0 mask+0: 1(-0.4,0) 2(0.4,0)
  silkscreen extent -0.53,-0.63 0.53,0.63, body extent -0.7,-0.38 0.7,0.38, height 0.25
FP-GRM31C-0_2-e0_3_0_8-IPC_A [mm]
  rect 1.555x1.906 smd paste+0 mask+0: 1(-1.476,0) 2(1.476,0)
  silkscreen extent -0.4,-0.95 0.4,0.95, body extent -2.75,-1.45 2.75,1.45, height 0.25
FP-GRM155-0_1-IPC_A [mm]
  rect 0.715x0.672 smd paste+0 mask+0: 1(-0.479,0) 2(0.479,0)
  silkscreen extent -0.84,-0.74 0.84,0.74, body extent -1.04,-0.54 1.04,0.54, height 0.25
FP-GRM155-0_2-IPC_B [mm]
  rect 0.728x0.706 smd paste+0 mask+0: 1(-0.439,0) 2(0.439,0)
  silkscreen extent -0.8,-0.75 0.8,0.75, body extent -0.95,-0.5 0.95,0.5, height 0.25
FP-GRM155-0_05-IPC_B [mm]
  rect 0.615x0.572 smd paste+0 mask+0: 1(-0.429,0) 2(0.429,0)
  silkscreen extent -0.74,-0.69 0.74,0.69, body extent -0.89,-0.44 0.89,0.44, height 0.25
FP-GRM155-0_15-IPC_A [mm]
  rect 0.804x0.758 smd paste+0 mask+0: 1(-0.477,0) 2(0.477,0)
  silkscreen extent -0.88,-0.78 0.88,0.78, body extent -1.08,-0.58 1.08,0.58, height 0.25
FP-GRT155-0_15-MFG [mm]
  rect 0.45x0.6 smd paste+0 mask+0: 1(-0.475,0) 2(0.475,0)
  silkscreen extent -0.58,-0.58 0.58,0.58, body extent -0.8,-0.43 0.8,0.43, height 0.25
FP-LQFP100-1L-MFG [mm]
  rect 1.2x0.3 smd paste+0 mask+0: 1(-7.75,6) 2(-7.75,5.5) 3(-7.75,5) 4(-7.75,4.5) 5(-7.75,4) 6(-7.75,3.5) 7(-7.75,3) 8(-7.75,2.5) 9(-7.75,2) 10(-7.75,1.5) 11(-7.75,1) 12(-7.75,0.5) 13(-7.75,0) 14(-7.75,-0.5) 15(-7.75,-1) 16(-7.75,-1.5) 17(-7.75,-2) 18(-7.75,-2.5) 19(-7.75,-3) 20(-7.75,-3.5) 21(-7.75,-4) 22(-7.75,-4.5) 23(-7.75,-5) 24(-7.75,-5.5) 25(-7.75,-6) 51(7.75,-6) 52(7.75,-5.5) 53(7.75,-5) 54(7.75,-4.5) 55(7.75,-4) 56(7.75,-3.5) 57(7.75,-3) 58(7.75,-2.5) 59(7.75,-2) 60(7.75,-1.5) 61(7.75,-1) 62(7.75,-0.5) 63(7.75,0) 64(7.75,0.5) 65(7.75,1) 66(7.75,1.5) 67(7.75,2) 68(7.75,2.5) 69(7.75,3) 70(7.75,3.5) 71(7.75,4) 72(7.75,4.5) 73(7.75,5) 74(7.75,5.5) 75(7.75,6)
  rect 0.3x1.2 smd paste+0 mask+0: 26(-6,-7.75) 27(-5.5,-7.75) 28(-5,-7.75) 29(-4.5,-7.75) 30(-4,-7.75) 31(-3.5,-7.75) 32(-3,-7.75) 33(-2.5,-7.75) 34(-2,-7.75) 35(-1.5,-7.75) 36(-1,-7.75) 37(-0.5,-7.75) 38(0,-7.75) 39(0.5,-7.75) 40(1,-7.75) 41(1.5,-7.75) 42(2,-7.75) 43(2.5,-7.75) 44(3,-7.75) 45(3.5,-7.75) 46(4,-7.75) 47(4.5,-7.75) 48(5,-7.75) 49(5.5,-7.75) 50(6,-7.75) 76(6,7.75) 77(5.5,7.75) 78(5,7.75) 79(4.5,7.75) 80(4,7.75) 81(3.5,7.75) 82(3,7.75) 83(2.5,7.75) 84(2,7.75) 85(1.5,7.75) 86(1,7.75) 87(0.5,7.75) 88(0,7.75) 89(-0.5,7.75) 90(-1,7.75) 91(-1.5,7.75) 92(-2,7.75) 93(-2.5,7.75) 94(-3,7.75) 95(-3.5,7.75) 96(-4,7.75) 97(-4.5,7.75) 98(-5,7.75) 99(-5.5,7.75) 100(-6,7.75)
  silkscreen extent -9.02,-7.1 7.1,7.1, body extent -8.45,-8.45 8.45,8.45, height 0.25
FP-LTST-C171GKT-MFG [mm]
  rect 1.2x1.2 smd paste+0 mask+0: 1(-1.05,0) 2(1.05,0)
  silkscreen extent -2.37,-1.05 1.05,1.05, body extent -1.75,-0.77 1.75,0.77, height 0.25
FP-MCS0402-IPC_A [mm]
  rect 0.665x0.672 smd paste+0 mask+0: 1(-0.504,0) 2(0.504,0)
  silkscreen extent -0.84,-0.74 0.84,0.74, body extent -1.04,-0.54 1.04,0.54, height 0.25
FP-MCS0402-MFG [mm]
  rect 0.55x0.55 smd paste+0 mask+0: 1(-0.45,0) 2(0.45,0)
  silkscreen extent -0.53,-0.65 0.53,0.65, body extent -0.82,-0.38 0.82,0.38, height 0.25
FP-MIC5332-SSYMT-TR-IPC_C [mm]
  rect 0.668x0.242 smd paste+0 mask+0: 1(-0.902,0.75)
  rrect100% 0.668x0.242 smd paste+0 mask+0: 2(-0.902,0.25) 4(-0.902,-0.75) 5(0.902,-0.75) 6(0.902,-0.25) 7(0.902,0.25) 8(0.902,0.75) ""(-0.902,-0.25)
  rect 0.65x1.25 smd paste-1000 mask+0: 9(0,0)
  silkscreen extent -1.76,-1 1,1, body extent -1.34,-1.1 1.34,1.1, height 0.25
FP-PNM0402-IPC_C [mm]
  rect 0.663x0.595 smd paste+0 mask+0: 1(-0.407,0) 2(0.407,0)
  silkscreen extent -0.74,-0.74 0.74,0.74, body extent -0.84,-0.44 0.84,0.44, height 0.25
FP-RK73H1E-IPC_C [mm]
  rect 0.488x0.472 smd paste+0 mask+0: 1(-0.414,0) 2(0.414,0)
  silkscreen extent -0.66,-0.67 0.66,0.67, body extent -0.76,-0.38 0.76,0.38, height 0.25
FP-RMCF0402-MFG [mm]
  rect 0.5x0.6 smd paste+0 mask+0: 1(-0.5,0) 2(0.5,0)
  silkscreen extent -0.55,-0.7 0.55,0.7, body extent -0.85,-0.4 0.85,0.4, height 0.25
FP-RN73R1E-IPC_C [mm]
  rect 0.488x0.472 smd paste+0 mask+0: 1(-0.414,0) 2(0.414,0)
  silkscreen extent -0.66,-0.67 0.66,0.67, body extent -0.76,-0.38 0.76,0.38, height 0.25
FP-SM03B-GHS-TB_LF_SN-MFG [mm]
  rect 0.6x1.7 smd paste+0 mask+0: 1(-1.25,2.275) 2(0,2.275) 3(1.25,2.275)
  rect 1x2.7 smd paste+0 mask+0: 4(-3.1,-0.925) 5(3.1,-0.925)
  silkscreen extent -3.5,-2.02 3.5,3.8, body extent -3.7,-2.37 3.7,3.22, height 0.25
FP-SM06B-GHS-TB_LF_SN-MFG [mm]
  rect 0.6x1.7 smd paste+0 mask+0: 1(-3.125,2.275) 2(-1.875,2.275) 3(-0.625,2.275) 4(0.625,2.275) 5(1.875,2.275) 6(3.125,2.275)
  rect 1x2.7 smd paste+0 mask+0: 7(-4.975,-0.925) 8(4.975,-0.925)
  silkscreen extent -5.38,-2.02 5.38,3.82, body extent -5.58,-2.37 5.58,3.22, height 0.25
FP-SMBJ-MFG [mm]
  rect 2.16x2.26 smd paste+0 mask+0: 1(-2.45,0) 2(2.45,0)
  silkscreen extent -4.22,-1.97 2.37,1.97, body extent -3.63,-2.07 3.63,2.07, height 0.25
FP-SML-LXT0805IW-TR-MFG [mm]
  rect 0.9x1.1 smd paste+0 mask+0: 1(-0.95,0) 2(0.95,0)
  silkscreen extent -2.1,-1 1.05,1, body extent -1.5,-0.8 1.5,0.8, height 0.25
FP-SOT23-IPC_A [mm]
  rect 1.655x0.602 smd paste+0 mask+0: 1(-0.975,0.95)
  rrect100% 1.655x0.602 smd paste+0 mask+0: 2(-0.975,-0.95) 3(0.975,0)
  silkscreen extent 0,-1.45 0.65,1.45, body extent -2.3,-1.95 2.3,1.95, height 0.25
FP-TFCR0402-IPC_A [mm]
  rect 0.665x0.672 smd paste+0 mask+0: 1(-0.504,0) 2(0.504,0)
  silkscreen extent -0.84,-0.74 0.84,0.74, body extent -1.04,-0.54 1.04,0.54, height 0.25
FP-USB4105-GF-A-MFG [mm]
  rrect100% 1x2.1 hole 1.7 slot 0.6 at 0 deg paste-2539.97 mask+0: 1(-4.32,3.015) 2(4.32,3.015)
  rrect100% 1x1.8 hole 1.4 slot 0.6 at 0 deg paste-2539.97 mask+0: 3(-4.32,-1.165) 4(4.32,-1.165)
  rect 0.6x1.15 smd paste+0 mask+0: A1-B12(-3.2,3.59) A4-B9(-2.4,3.59) B1-A12(3.2,3.59) B4-A9(2.4,3.59)
  rect 0.3x1.15 smd paste+0 mask+0: A5(-1.25,3.59) A6(-0.25,3.59) A7(0.25,3.59) A8(1.25,3.59) B5(1.75,3.59) B6(0.75,3.59) B7(-0.75,3.59) B8(-1.75,3.59)
  round 0.65 hole 0.65 unplated paste-2539.97 mask+0: ""(-2.89,2.515) ""(2.89,2.515)
  silkscreen extent -4.86,-3.84 4.86,4.84, body extent -4.96,-3.94 4.96,4.27, height 0.25
HRS_DM3AT-SF-PEJM5 [mm]
  rect 0.7x1.2 smd: 1(2.775,7.975) 2(1.675,7.975) 3(0.575,7.975) 4(-0.525,7.975) 5(-1.625,7.975) 6(-2.725,7.975) 7(-3.825,7.975) 8(-4.925,7.975) SWB(-5.875,7.975)
  rect 1x1.2 smd: P1(-6.825,3.675) P4(4.325,7.975)
  rect 1x2.8 smd: P2(-6.825,-6.675)
  rect 1.3x1.9 smd: P3(6.675,-7.125)
  rect 1x0.8 smd: SWA(-6.825,-2.525)
  Keep-Out Layer region: 5.475,-8.075 2.925,-8.075 2.925,-6.725 5.475,-6.725
  Keep-Out Layer region: 3.275,1.375 -5.425,1.375 -5.425,2.975 3.275,2.975
  Keep-Out Layer region: -5.425,-5.925 -6.125,-5.925 -6.125,1.675 -5.425,1.675
  Keep-Out Layer region: -6.475,-0.525 -7.225,-0.525 -7.225,3.075 -6.475,3.075
  Keep-Out Layer region: -6.475,4.275 -7.225,4.275 -7.225,7.525 -6.475,7.525
  silkscreen extent -6.93,-8.08 6.93,9.67, body extent -6.92,-8.08 6.93,8.08, height 1.68
IC_TPS2121RUXR [mm]
  rrect50% 1.05x0.4 smd mask+0: 1(-0.675,0.35) 2(-0.675,-0.35) 7(0.675,-0.35) 8(0.675,0.35)
  round 0.4 hole 0.25 mask+0: 1_1(-0.4,0.35) 2_1(-0.4,-0.35) 7_1(0.4,-0.35) 8_1(0.4,0.35)
  rrect50% 0.2x0.6 smd mask+0: 3(-0.75,-1.15) 4(-0.25,-1.15) 5(0.25,-1.15) 6(0.75,-1.15) 9(0.75,1.15) 10(0.25,1.15) 11(-0.25,1.15) 12(-0.75,1.15)
  silkscreen extent -1.9,0.3 -1.7,0.5, body extent -1,-1.25 1,1.25, height 1
IND_XAL4030-332MEB [mm]
  rect 0.98x3.4 smd: 1(-1.185,0) 2(1.185,0)
  silkscreen extent -2,-2 2,2
NXP-SOIC-8_L [mm] "SOIC, 8-Leads, Body 5x4mm, Pitch 1.27mm, IPC High Density"
  oval 1.25x0.55 smd: 1(-2.625,1.905) 2(-2.625,0.635) 3(-2.625,-0.635) 4(-2.625,-1.905) 5(2.625,-1.905) 6(2.625,-0.635) 7(2.625,0.635) 8(2.625,1.905)
  silkscreen extent -2.75,-2.5 1.6,2.85, body extent -3,-2.5 3,2.5, height 1.75
ONSC-SMB-2-403A-03_H_V [mm] "Molded, 2-Leads, Body 4.6x3.95mm"
  rect 2.159x2.743 smd: 1(-2.21,0) 2(2.21,0)
  silkscreen extent -3.16,-2 2.3,2.05, body extent -2.3,-1.97 2.3,1.97, height 2.42
ONSC-SOD-123FL-2-498_V [mm] "SOD, 2-Leads, Body 2.7x1.65mm"
  rect 1.25x1.22 smd: 1(-1.475,0) 2(1.475,0)
  silkscreen extent -1.6,-0.82 0.45,1.28, body extent -1.35,-0.82 1.35,0.82, height 0.98
PQFN50P300X250X97-14N [mm]
  rrect50% 0.59x0.35 smd mask+0: 1(-1.165,0.75) 2(-1.165,0.25) 3(-1.165,-0.25) 4(-1.165,-0.75) 8(1.165,-0.75) 9(1.165,-0.25) 10(1.165,0.25) 11(1.165,0.75)
  rrect50% 0.35x0.59 smd mask+0: 5(-0.5,-0.915) 6(0,-0.915) 7(0.5,-0.915) 12(0.5,0.915) 13(0,0.915) 14(-0.5,0.915)
  silkscreen extent -2.1,-1.25 1.5,1.25
PQFN50P450X300X100-16N [mm]
  rect 0.35x0.59 smd: 1(-1.5,1.165) 2(-1,1.165) 3(-0.5,1.165) 4(0,1.165) 5(0.5,1.165) 6(1,1.165) 7(1.5,1.165) 9(1.5,-1.165) 10(1,-1.165) 11(0.5,-1.165) 12(0,-1.165) 13(-0.5,-1.165) 14(-1,-1.165) 15(-1.5,-1.165)
  rect 0.59x0.35 smd: 8(1.915,0) 16(-1.915,0)
  silkscreen extent -2.25,-1.5 2.25,2.2
RESC1005X40X25LL05T05 [mm] "Chip Resistor, 2-Leads, Body 1.00x0.50mm, IPC High Density"
  rect 0.45x0.45 smd: 1(-0.4,0) 2(0.4,0)
  body extent -0.53,-0.27 0.53,0.28, height 0.4
RESC1005X40X25NL05T05 [mm] "Chip Resistor, 2-Leads, Body 1.00x0.50mm, IPC Medium Density"
  rect 0.55x0.55 smd: 1(-0.45,0) 2(0.45,0)
  body extent -0.53,-0.27 0.53,0.28, height 0.4
RESC1005X40X25NL05T10 [mm] "Chip Resistor, 2-Leads, Body 1.00x0.50mm, IPC Medium Density"
  rect 0.6x0.55 smd: 1(-0.425,0) 2(0.425,0)
  body extent -0.53,-0.27 0.53,0.28, height 0.4
SON95P450X400X80-9N [mm]
  rect 0.76x0.42 smd: 1(-1.985,1.425) 2(-1.985,0.475) 3(-1.985,-0.475) 4(-1.985,-1.425) 5(1.985,-1.425) 6(1.985,-0.475) 7(1.985,0.475) 8(1.985,1.425)
  rect 2.6x3.6 smd paste-3: 9(0,0)
  silkscreen extent -3.46,-2.25 2,2.25, body extent -2,-2.25 2,2.25, height 0.8
SOT95P280X145-6N [mm]
  rrect25% 1.21x0.59 smd: 1(-1.255,0.95) 2(-1.255,0) 3(-1.255,-0.95) 4(1.255,-0.95) 5(1.255,0) 6(1.255,0.95)
  silkscreen extent -2.66,-1.57 0.81,1.57, body extent -1.4,-1.46 1.4,1.46, height 0.4
SOT457 [mm]
  rect 0.55x0.8 smd: 1(-0.95,-1.2) 2(0,-1.2) 3(0.95,-1.2) 4(0.95,1.2) 5(0,1.2) 6(-0.95,1.2)
  silkscreen extent -1.4,-0.75 1.4,0.75
SW_TL1015AF160QG [mm]
  rect 0.95x1.4 smd: 1(-2.075,0) 2(2.075,0)
  silkscreen extent -3.35,-1.45 1.95,1.45
TDK-ACT45B-510-2P-TL003-4_V [mm] "SMD, 4-Leads, Body 4.7x3.4mm, Pitch 2.5mm"
  rect 1.35x0.9 smd: 1(-2.275,1.25) 2(-2.275,-1.25) 3(2.275,-1.25) 4(2.275,1.25)
  silkscreen extent -3.62,-1.7 2.35,1.7, body extent -2.35,-1.7 2.35,1.7, height 3
XDCR_MS561101BA03-50 [mm]
  rect 1.1x0.6 smd: 1(-1.1,1.875) 2(-1.1,0.625) 3(-1.1,-0.625) 4(-1.1,-1.875) 5(1.1,-1.875) 6(1.1,-0.625) 7(1.1,0.625) 8(1.1,1.875)
  Keep-Out Layer region: 0.55,1.575 1.65,1.575 1.65,0.925 0.55,0.925 0.55,0.325 1.65,0.325 1.65,-0.325 0.55,-0.325 0.55,-0.925 1.65,-0.925 1.65,-1.575 0.55,-1.575 0.55,-2.175 -0.55,-2.175 -0.55,-1.575 -1.65,-1.575 -1.65,-0.925 -0.55,-0.925 -0.55,-0.325 -1.65,-0.325 -1.65,0.325 -0.55,0.325 -0.55,0.925 -1.65,0.925 -1.65,1.575 -0.55,1.575 -0.55,2.175 0.55,2.175
  silkscreen extent -2.75,-2.5 1.5,2.5, body extent -1.5,-2.5 1.5,2.5, height 1
XTAL_SXT32412BB07-25.000MT [mm]
  rect 1x1.3 smd: 1(-0.775,1.125) 2(-0.775,-1.125) 3(0.775,-1.125) 4(0.775,1.125)
  silkscreen extent -2.12,-0.23 1.25,1.22, body extent -1.25,-1.6 1.25,1.6, height 0.8

## Part data
A1: "Sensor;MS5611-BT M-CAPS 3X5X1MM T&R;Pressure;MS561101BA03-50", Package="SMD-8 Measurement Specialties", Check_prices=https://www.snapeda.com/parts/MS561101BA03-50/TE+Connectivity+ALCOSWITCH+Switches/view-part/?ref=eda, MF="TE Connectivity", MP=MS561101BA03-50, SnapEDA_Link=https://www.snapeda.com/parts/MS561101BA03-50/TE+Connectivity+ALCOSWITCH+Switches/view-part/?ref=snap
C1 C3 C7 C20 C34 C46 C47 C48 C49: library part CMP-06035-058540-1, "Multi-Layer Ceramic Capacitor 4.7uF 10V X5R ±20% 0402 Paper T/R"
C2 C4 C5 C6 C8 C11 C12 C14 C15 C16 C17 C18 C19 C23 C24 C25 C30 C32 C35 C37 C39 C52 C56 C58 C59: library part CMP-03020-002733-1, "CAP CER 0.1UF 10V X7R 0402", Capacitance="0.10 μF", Manufacturer=Kemet, Manufacturer Part Number=C0402C104K8RACAUTO, Package=C0402-BB, Temperature="-55°C to +125°C", Temperature Characteristic=X7R, Temperature Coefficient=15%, Temperature Range High=+125°C, Temperature Range Low=-55°C, Tolerance=0.1, Voltage Rating="10 V", Automotive=No, Category=Cap, ComponentLink2Description=Datasheet, ComponentLink2URL=https://content.kemet.com/datasheets/KEM_C1002_X7R_SMD.pdf, Device Class L1="Passive Components", Device Class L2=Capacitors, Device Class L3="Ceramic Capacitors", Digikey Description="CAP CER 0.1UF 10V X7R 0402", Height=0.55mm, Ipc Land Pattern Name=CAPC10050X50, Lead Free=Yes, Material=Ceramic, Octopart=https://octopart.com/c0402c104k8racauto-kemet-9145167, RoHS=TRUE
C9 C10 C26 C31: library part CMP-06035-048202-1, "Chip Multilayer Ceramic Capacitors for General Purpose, 0402, 2.2uF, X7R, 15%, 10%, 10V"
C13 C27 C33 C36 C38: library part CMP-06035-009893-1, "Chip Multilayer Ceramic Capacitors for General Purpose, 0402, 1.0uF, X7R, 15%, 20%, 6.3V"
C21 C22: library part CMP-03020-024161-1, "C0402 18 pF X8R 5.00% 50 V", Capacitance="18 pF", Manufacturer=Kemet, Manufacturer Part Number=C0402C180J5HACAUTO, Package=C0402-BB, Temperature="-55°C to +125°C", Temperature Characteristic=X8R, Temperature Coefficient=15%, Temperature Range High=+125°C, Temperature Range Low=-55°C, Tolerance=0.05, Voltage Rating="50 V", Automotive=No, Category=Cap, ComponentLink2Description=Datasheet, ComponentLink2URL=https://content.kemet.com/datasheets/KEM_C1002_X7R_SMD.pdf, Device Class L1="Passive Components", Device Class L2=Capacitors, Device Class L3="Ceramic Capacitors", Height=0.55mm, Ipc Land Pattern Name=CAPC10050X50, Lead Free=Yes, Material=Ceramic, Octopart=https://octopart.com/c0402c180j5hacauto-kemet-88080534, RoHS=TRUE
C28 C29: library part CMP-03020-024996-1, "C0402 12 pF X8R 5.00% 50 V", Capacitance="12 pF", Manufacturer=Kemet, Manufacturer Part Number=C0402C120J5HACTU, Package=C0402-BB, Temperature="-55°C to +125°C", Temperature Characteristic=X8R, Temperature Coefficient=15%, Temperature Range High=+125°C, Temperature Range Low=-55°C, Tolerance=0.05, Voltage Rating="50 V", Automotive=No, Category=Cap, ComponentLink2Description=Datasheet, ComponentLink2URL=https://content.kemet.com/datasheets/KEM_C1002_X7R_SMD.pdf, Device Class L1="Passive Components", Device Class L2=Capacitors, Device Class L3="Ceramic Capacitors", Height=0.55mm, Ipc Land Pattern Name=CAPC10050X50, Lead Free=Yes, Material=Ceramic, Octopart=https://octopart.com/c0402c120j5hactu-kemet-88724098, RoHS=TRUE
C40: library part CMP-2100-03641-2, "CAP CER 0.1UF 16V X7R 0402", Capacitance=0.10μF, Manufacturer=Murata, Manufacturer Part Number=GRM155R71C104KA88D, Package=GRM15, Temperature="-55°C to +125°C", Temperature Characteristic=X7R, Temperature Range High=+125°C, Temperature Range Low=-55°C, Tolerance=10%, Voltage Rating=16Vdc, Category=Cap, ComponentLink2Description=Datasheet, ComponentLink2URL=https://search.murata.co.jp/Ceramy/image/img/A01X/G101/ENG/GRM155R71H471KA01-01A.pdf, Device Class L1="Passive Components", Device Class L2=Capacitors, Device Class L3="Ceramic Capacitors", Digikey Description="CAP CER 0.1UF 16V X7R 0402", Height=0.55mm, Ipc Land Pattern Name=CAPC10050X219, Lead Free=yes, Material=Ceramic, Mouser Description="0402 0.1 uF 16V ±10 % Tolerance X7R SMT Multilayer Ceramic Capacitor", Octopart=https://octopart.com/grm155r71c104ka88d-murata-196880, RoHS=TRUE, Standoff Height=0mm
C41 C42: library part MSASU32MSB7475MPNA01, Package=None, Availability=Unavailable, MF="{'manufacturer': u'Taiyo Yuden'}", MP=MSASU32MSB7475MPNA01, Price=None
C43: library part CMP-00621-74602085-1, "CS0402KRX7R8BB104 Multilayer Ceramic Capacitor, 0.1 uF, 25 V, ± 10%, X7R, 0402 [1005 Metric]", Case/Package=0402, Max Operating Temperature=125°C, Min Operating Temperature=-55°C, Tolerance=10%, Voltage Rating=25V, Capacitance=100nF, Features="Soft Termination", Height=650µm, Length=990.6µm, Material=Ceramic, Mount="Surface Mount", NexarPartId=74602085, RoHS=Compliant, Thickness=660.4µm, Width=508µm
C44: library part CMP-2008-04203-1, Manufacturer=Murata, Part Number=GRM1555C1E470JA01D
C45: library part CMP-06035-007919-1, "Chip Multilayer Ceramic Capacitors for General Purpose, 1206, 47uF, X5R, 15%, 10%, 10V", Case Code (Imperial)=1206, Case Code (Metric)=3216, Dielectric=X5R, Max Operating Temperature=85°C, Min Operating Temperature=-55°C, Package Quantity=6000, Resistor Type=Ceramic, Tolerance=10%, Voltage Rating=10V, Capacitance=47uF, Case/Package=1206, Depth=1.6mm, Height=1.6mm, Length=3.2mm, Mount="Surface Mount", Packaging="Tape and Reel", Termination=SMD/SMT, Thickness=0.071inch, Voltage Rating (DC)=10V, Weight=0.001411oz, Width=0.063inch
C50: library part CMP-2008-02101-1, Manufacturer=Kemet, Part Number=C0402C103K3RALTU
C51 C57: library part CMP-06035-053544-1, "Chip Multilayer Ceramic Capacitors for General Purpose, 0402, 2.2uF, X7R, 15%, 10%, 10V"
C53: library part CERAMIC-10UF-6.3V-20%-X5R(0402), "10 ÂµF Â±20% 6.3V Ceramic Capacitor X5R 0402 (1005 Metric)", Package="0402 Yageo", Check_prices=https://www.snapeda.com/parts/CC0402MRX5R5BB106/Yageo/view-part/?ref=eda, MF=Yageo, MP=CC0402MRX5R5BB106, SnapEDA_Link=https://www.snapeda.com/parts/CC0402MRX5R5BB106/Yageo/view-part/?ref=snap
C54 C55: library part CMP-06035-012596-1, "Chip Multilayer Ceramic Capacitors for General Purpose, 0402, 1.0uF, X7R, 15%, 10%, 10V"
D1: library part CMP-02539-000063-1, "DIODE SCHOTTKY 40V 3A DO214AC", Average Rectified Current=3A, Case/Package=DO-214AC, Forward Voltage=380mV, Max Forward Surge Current (Ifsm)=75A, Max Operating Temperature=150°C, Max Repetitive Reverse Voltage (Vrrm)=40V, Max Reverse Current=17mA, Min Operating Temperature=-65°C, Package Quantity=7500, Element Configuration=Single, Forward Current=3A, Max Reverse Voltage (DC)=40V, Mount="Surface Mount", Packaging="Tape and Reel", Peak Non-Repetitive Surge Current=75A, Radiation Hardening=No, Reverse Voltage (DC)=40V, RoHS Compliant=Yes, Series="Automotive, AEC-Q101"
D2 D3 D4 D12: library part CMP-1061-00612-1, "200 W Transient Voltage Suppressor, 2-Pin SOD-123FL, Pb-Free, Tape and Reel", Manufacturer="On Semiconductor", ComponentLink1Description="Manufacturer URL", ComponentLink1URL=http://www.onsemi.com/, ComponentLink2Description=Datasheet, ComponentLink2URL=http://www.onsemi.com/pub_link/Collateral/SMF5.0AT1-D.PDF, ComponentLink3Description="Package Specification", ComponentLink3URL=http://www.onsemi.com/pub_link/Collateral/498-01.PDF, DatasheetVersion="Rev. 7", Direction=Unidirectional, IR Max (uA)=400, Mounting Technology="Surface Mount", PackageDescription="2-Pin SOD, Body 1.65 x 2.7 mm", PackageReference=SOD-123FL-2-498, PackageVersion="Rev. D, 05/2013", Packing="Tape and Reel", PartNumber=SMF5.0AT1G, RoHS=Pb-Free, V(BR) Typ (V)=6.7
D5: library part CMP-14436-000014-1, "TVS DIODE 24VWM 42VC TO236AB"
D6: library part CMP-22017-000007-1, "LED GREEN CLEAR CHIP SMD", Case Code (Imperial)=0805, Case Code (Metric)=2012, Color=Green, Forward Current=30mA, Forward Voltage=2.1V, Lens Color=Colorless, Max Operating Temperature=85°C, Min Operating Temperature=-55°C, Package Quantity=1, Power Dissipation=100mW, Reverse Voltage=5V, Test Current=10mA, Case/Package=0805, Depth=1.25mm, Dominant Wavelength=569nm, Height=0.8mm, Illumination Color=Green, Lead Free="Lead Free", Length=2mm, Lens Style=Diffused, Lens Transparency=Clear, Luminous Intensity=12mcd, Mount="Surface Mount", Number of Elements=1, Number of LEDs=1, Number of Pins=2, Packaging="Tape and Reel", Power Rating=100mW, Radiation Hardening=No, Viewing Angle=130°, Wavelength=585nm, Width=1.25mm
D7: library part CMP-04989-000010-1, "TVS DIODE 5.5V 14V 2X1SON", Max Operating Temperature=125°C, Min Operating Temperature=-40°C, Interface=LVDS, Lead Free="Lead Free", Number Of Channels=1, RoHS Compliant=Yes
D8: "13V Clamp 20A (8/20Âµs) Ipp Tvs Diode Surface Mount 6-TSOP", Package=None, Check_prices=https://www.snapeda.com/parts/PESD5V0S4UD/NXP+Semiconductors/view-part/?ref=eda, MF="NXP Semiconductors", MP=PESD5V0S4UD, SnapEDA_Link=https://www.snapeda.com/parts/PESD5V0S4UD/NXP+Semiconductors/view-part/?ref=snap
D9: library part CMP-1055-00339-1, "Schottky Power Rectifier, 2-Pin SMB, Pb-Free, Tape and Reel", Manufacturer="On Semiconductor", ComponentLink1Description="Manufacturer URL", ComponentLink1URL=http://www.onsemi.com/, ComponentLink2Description=Datasheet, ComponentLink2URL=http://www.onsemi.cn/pub_link/Collateral/MBRS360T3-D.PDF, ComponentLink3Description="Package Specification", ComponentLink3URL=http://www.onsemi.com/pub_link/Collateral/1SMB5913BT3-D.PDF, Configuration=Single, DatasheetVersion="Rev. 8", IFSM Max (A)=125, Mounting Technology="Surface Mount", PackageDescription="2-Pin Small Molded Package, J-Bend Lead, Body 4.33 x 3.625 mm", PackageReference=SMB-2-403A-03_H, PackageVersion="Rev. H, 05/2011", Packing="Tape and Reel", PartNumber=MBRS360BT3G, RoHS=TRUE
D10: library part CMP-08607-000063-1, "TVS DIODE 26V 42.1V DO214AA", Breakdown Voltage=28.9V, Clamping Voltage=42.1V, Manufacturer=Littelfuse, Max Junction Temp=+150°C, Package=SMBJ, Peak Pulse Current=14.3A, Peak Pulse Power=600W, Reverse Standoff Voltage=26V, Temperature="-65°C to +150°C", Temperature Range Low=-65°C, Automotive=No, Category=Diode, ComponentLink2Description=Datasheet, ComponentLink2URL=https://www.littelfuse.com/~/media/electronics/datasheets/tvs_diodes/littelfuse_tvs_diode_smbj_datasheet.pdf.pdf, Device Class L1="Circuit Protection", Device Class L2="TVS Diodes", Device Class L3=unset, Digikey Description="TVS DIODE 26V 42.1V DO214AA", Direction=Unidirectional, Height=2.61mm, Lead Free=Yes, Manufacturer Part Number=SMBJ26A, Mouser Description="TVS Diodes - Transient Voltage Suppressors 26Vr 600W 14.3A 5% UniDirectional", Number Of Channels=1, Octopart=https://octopart.com/smbj26a-littelfuse-350771, RoHS=TRUE, Temperature Range High=+150°C
D11: library part CMP-1724-00002-2, "LED RED DIFFUSED SMD", Case Code (Imperial)=0805, Case Code (Metric)=2012, Color=Red, Forward Current=20mA, Forward Voltage=2V, Lens Color=White, Max Operating Temperature=80°C, Min Operating Temperature=-25°C, Package Quantity=1, Approvals=UL, Case/Package=0805, Dominant Wavelength=635nm, Height=0.8mm, Illumination Color=Red, Lead Free="Lead Free", Length=2mm, Lens Style=Rectangular, Lens Transparency=Diffused, Luminous Intensity=11mcd, Mount="Surface Mount", Number of LEDs=1, Number of Pins=2, Packaging="Tape and Reel", REACH SVHC="No SVHC", Test Current=20mA, Viewing Angle=140°, Wavelength=635nm, Width=1.25mm
FB1: library part CMP-00260-117051428-1, "BLM15PE601SH1D Ferrite Bead, 600 Ohm, 25%, 0402 Rohs Compliant: Yes", Case/Package=0402, Max Operating Temperature=125°C, Min Operating Temperature=-55°C, Resistance=400mΩ, RMS Current (Irms)=700mA, Test Frequency=100MHz, Tolerance=25%, Core Material=Ferrite, Height=550µm, Lifecycle Status=Production, NexarPartId=117051428, Series Resistance=400mΩ
FL1 FL2: library part BLM15AG102SN1D, Package=None, Availability=Unavailable, MF=Murata, MP=BLM15AG102SN1D, Price=None
FL3: Package=None, Availability=Unavailable, MF="{'manufacturer': u'KYOCERA AVX'}", MP=KNH16C104DA5TS, Price=None
J1: library part CMP-245163-000001-1, "CONN RCPT USB2.0 TYPEC 5A", Current Rating=5/6.25/1.25/0.25A, Manufacturer=GCT, Package=0, Temperature="-40°C to +85°C", Temperature Range High=+85°C, Temperature Range Low=-40°C, Voltage Rating=20V, Automotive=No, Category=Conn, ComponentLink2Description=Datasheet, ComponentLink2URL=https://gct.co/files/drawings/usb4105.pdf, Conn Orientation="Right Angle", Contact Material=Gold,Nickel, Device Class L1=Connectors, Device Class L2="USB Connectors", Device Class L3=unset, Digikey Description="CONN RCPT USB2.0 TYPEC 5A", Height=3.46mm, Is Female=yes, Lead Free=Yes, Manufacturer Part Number=USB4105-GF-A, Number Of Contacts=16, Octopart=https://octopart.com/usb4105-gf-a-gct-106627878, RoHS=TRUE, Usb Standard="USB 2.0"
J2: library part CMP-17439-000266-1, "CONN HEADER SMD 5POS 1MM", Color=Natural, Flammability Rating="UL94 V-0", Max Operating Temperature=85°C, Min Operating Temperature=-25°C, Package Quantity=1500, Voltage Rating=50V, Connector Type=Header, Contact Finish - Mating=TIN, Contact Material="Copper Alloy", Contact Plating=Tin, Contact Shape=Square, Contact Type="Male Pin", Fastening Type=Pull, Insulation Color=Natural, Insulation Material=Nylon, Lead Free="Lead Free", Mated Stacking Heights=4.9mm, Mount="Surface Mount", Number of Positions=5, Number of Rows=1, Packaging="Cut Tape", Pitch=0.039inch, Series=SR, Termination=Solder
J3: "10 (8 + 2) Position Card Connector Secure Digital - microSDâ„¢ Surface Mount, Right Angle Gold", Package=None, Check_prices=https://www.snapeda.com/parts/DM3AT-SF-PEJM5/Hirose+Electric+Co+Ltd/view-part/?ref=eda, MF=Hirose, MP=DM3AT-SF-PEJM5, SnapEDA_Link=https://www.snapeda.com/parts/DM3AT-SF-PEJM5/Hirose+Electric+Co+Ltd/view-part/?ref=snap
J4 J8: library part CMP-17439-000068-1, "CONN HEADER SMD R/A 3POS 1.25MM", Color=Natural, Current Rating=1A, Flammability Rating="UL94 V-0", Max Operating Temperature=85°C, Min Operating Temperature=-25°C, Voltage Rating=50V, Connector Type=Header, Contact Finish - Mating=TIN, Contact Material=Bronze, Contact Plating=Tin, Contact Shape=Rectangular, Contact Type="Outer Shroud Contact", Fastening Type=Ramp, Gender=Male, Housing Color=Natural, Housing Material=Nylon, Insulation Color=Natural, Insulation Material=Nylon, Lead Free="Lead Free", Mount="Surface Mount", Number Of Contacts=3, Number of Positions=3, Number of Rows=1, Orientation="Right Angle", Packaging="Tape and Reel", Pitch=0.049inch, REACH SVHC="No SVHC", Series=GH, Termination=Solder, Voltage Rating (AC)=50V, Wire/Cable Gauge=26AWG
J5 J6: library part CMP-17439-000062-2, "CONN HEADER SMD 4POS 1.25MM", Case/Package=SMD/SMT, Current Rating=1A, Housing Color=Natural, Max Operating Temperature=85°C, Min Operating Temperature=-25°C, Voltage Rating=50V, Contact Material=Bronze, Contact Plating=Tin, Gender=Male, Housing Material=Nylon, Lead Free="Lead Free", Number Of Contacts=4, Number of Positions=4, Number of Rows=4, Orientation=Straight, Packaging="Cut Tape", Pitch=1.25mm, REACH SVHC="No SVHC", Series=GH, Termination=Crimp, Voltage Rating (AC)=50V, Wire/Cable Gauge=26AWG
J7: library part CMP-17439-000195-1, "CONN HEADER SMD 8POS 2MM", Color=White, Contact Resistance=20mR, Current Rating=2A, Flammability Rating="UL94 V-0", Housing Color=Beige, Insulation Color=Natural, Insulation Resistance=1GR, Max Operating Temperature=85°C, Max Voltage Rating (AC)=100V, Min Operating Temperature=-25°C, Connector Type=Header, Contact Finish - Mating=TIN, Contact Material="Copper Alloy", Contact Mating Length=0.13inch, Contact Plating=Tin, Contact Shape=Square, Contact Type="Male Pin", Depth=5mm, Fastening Type=Detent, Gender=Male, Height=9.4mm, Housing Material=Polyamide, Insulation Material=Nylon, Lead Free="Lead Free", Lead Pitch=2mm, Length=19.95mm, Mated Stacking Heights=8.6mm, Max Current Rating=2A, Mount="Surface Mount", Number Of Contacts=8, Number of Poles=8, Number of Positions=8, Number of Rows=1, Orientation=Straight, Packaging="Tape and Reel", Pitch=2mm, REACH SVHC="No SVHC", Series=PH, Termination=Solder, Voltage Rating=100V, Voltage Rating (AC)=100V, Width=5.5mm, Working Voltage=100V
J9: library part CMP-17439-000061-1, "CONN HEADER SMD R/A 6POS 1.25MM", Color=Natural, Contact Resistance=50mR, Current Rating=1A, Housing Color=Beige, Max Operating Temperature=85°C, Max Voltage Rating (AC)=50V, Min Operating Temperature=-25°C, Connector Type="Outer Shroud Contact", Contact Material=Bronze, Contact Plating=Tin, Depth=4.05mm, Fastening Type=Ramp, Housing Material=Polyamide, Lead Free="Lead Free", Length=10.75mm, Max Current Rating=1A, Mount="Surface Mount", Number Of Contacts=6, Number of Positions=6, Number of Rows=1, Orientation="Right Angle", Packaging="Tape and Reel", Pitch=1.25mm, Termination=Solder, Voltage Rating=50V
L1: library part CMP-2000-05391-1, "Common-Mode Choke for CAN Bus System, 51uH, 50 V DC, -40 to 150 degC, 4-Pin SMD, RoHS, Tape and Reel", Current=200mA, DC Resistance (DCR)=1OhmMax, Inductance=51µH, Manufacturer=TDK, Operating Temperature=-40degC~150degC, Package / Case=Horizontal,4PCPad, Standard Package=1, Catalog Drawings="(ACM4532,ACT45B)-xxx-2P_Top /  / ACT45B-xxx-2P_Side /  / ACT45B-xxx-2P_Bottom", Category=Filters, Datasheet URL=https://datasheet.ciiva.com/22726/1649098-22726290.pdf, Datasheet Version=Aug-12, Dynamic Catalog=ACTSeries, Family=CommonModeChokes, Featured Product=FerriteChipCommon-ModeFilterforCAN-BUSSystem, Filter Type=Data,SignalLine, Height (Max)="0.118\"(3.00mm)", Impedance=2.8kOhm, Manufacturer URL=http://www.tdk.com/, Mounting Type=SurfaceMount, Number of Lines=2, Other Drawings="ACM3225SeriesSchematic /  / ACT45B-xxx-2P_Footprint", Other Names=445-3958-6, Packaging=Digi-Reel, Series=ACT, Size / Dimension="0.177\"Lx0.126\"W(4.50mmx3.20mm)"
L2: library part XAL4030-332MEB, Package=None, Availability=Unavailable, MP=XAL4030-332MEB, Price=None
R1 R7 R15 R16: library part CMP-26527-006952-1, "22Ω ±1% 0.063W 0402 Thick Film Chip Resistor AEC-Q200 compliant", Case/Package=0402, Max Operating Temperature=155°C, Max Power Dissipation=63mW, Min Operating Temperature=-55°C, Resistance=22R, Resistor Type="Thick Film", Temperature Coefficient=100ppm/°C, Tolerance=1%, Contact Plating=Tin, Features="Automotive AEC-Q200", Height=0.016inch, Length=0.039inch, Mount="Surface Mount", Number of Terminations=2, Packaging="Tape and Reel", RoHS Compliant=Yes, Series=RMCF, Width=0.02inch
R2 R3 R4 R5 R6 R11 R18 R19 R20 R21 R22 R23 R24 R25 R26 R27 R43: library part CMP-02407-000363-1, "RES SMD 1.2K OHM 1% 1/10W 0402", Case Code (Imperial)=0402, Case Code (Metric)=1005, Max Operating Temperature=175°C, Max Power Dissipation=100mW, Min Operating Temperature=-55°C, Package Quantity=10000, Resistance=10kR, Temperature Coefficient=25ppm/°C, Tolerance=0.5%, Voltage Rating=50V, Case/Package=0402, Composition="Thin Film", Contact Plating=Tin, Features="Automotive AEC-Q200", Height=0.015inch, Length=0.039inch, Number of Terminations=2, Packaging="Tape and Reel", Power Rating=100mW, Radiation Hardening=No, Termination=SMD/SMT, Weight=2.1E-05oz, Width=0.5mm
R8: library part CMP-02407-007381-1, "RES Thick Film, 47kΩ, 1%, 0.063W, 100ppm/°C, 0402", Case/Package=0402, Max Operating Temperature=155°C, Max Power Dissipation=63mW, Min Operating Temperature=-55°C, Package Quantity=50000, Resistance=47kR, Temperature Coefficient=100ppm/°C, Tolerance=1%, Composition="Thick Film", Contact Plating=Tin, Features="Automotive AEC-Q200", Height=0.016inch, Lead Free="Lead Free", Length=0.039inch, Number of Terminations=2, Packaging="Tape and Reel", Radiation Hardening=No, Width=0.02inch
R9 R10: library part CMP-04015-008529-1, "5.1kΩ ±1% 0.063W, 1/16W Chip Resistor 0402 (1005 Metric) Moisture Resistant Thin Film"
R12: library part CMP-2002-07370-1, Manufacturer="Yageo / Phycomp", Part Number=RC0402FR-07120RL
R13 R14: library part CMP-03613-000096-1, "RES Thick Film, 4.7kΩ, 1%, 0.063W, 50ppm/°C, 0402", Case/Package=0402, Max Operating Temperature=155°C, Max Power Dissipation=63mW, Min Operating Temperature=-55°C, Package Quantity=10000, Resistance=4.7kR, Resistor Type="Thick Film", Temperature Coefficient=50ppm/°C, Tolerance=1%, Features="Automotive AEC-Q200", Height=0.016inch, Length=0.039inch, Number of Terminations=2, Packaging="Tape and Reel", RoHS Compliant=Yes, Series=CRCW-P, Width=0.02inch
R17 R42: library part CMP-02407-001712-1, "RES SMD 1.2K OHM 1% 1/10W 0402", Case Code (Imperial)=0402, Case Code (Metric)=1005, Max Operating Temperature=175°C, Max Power Dissipation=200mW, Min Operating Temperature=-55°C, Resistance=1kR, Temperature Coefficient=25ppm/°C, Tolerance=0.5%, Case/Package=0402, Composition="Thin Film", Features="Automotive AEC-Q200", Number of Terminations=2, Packaging="Cut Tape"
R28: library part CMP-02407-000150-1, "RES SMD 1.2K OHM 1% 1/10W 0402", Case Code (Imperial)=0402, Case Code (Metric)=1005, Max Operating Temperature=175°C, Max Power Dissipation=200mW, Min Operating Temperature=-55°C, Resistance=100R, Temperature Coefficient=25ppm/°C, Tolerance=0.5%, Case/Package=0402, Composition="Thin Film", Features="Automotive AEC-Q200", Number of Terminations=2, Packaging="Cut Tape"
R29 R30 R31 R32: library part CMP-26527-001180-1, "33Ω ±5% 0.063W 0402 Thick Film Chip Resistor AEC-Q200 compliant", Case Code (Imperial)=0402, Case Code (Metric)=1005, Max Operating Temperature=155°C, Max Power Dissipation=63mW, Min Operating Temperature=-55°C, Resistance=33R, Resistor Type="Thick Film", Temperature Coefficient=100ppm/°C, Tolerance=5%, Case/Package=0402, Contact Plating=Tin, Features="Automotive AEC-Q200", Height=0.016inch, Length=0.039inch, Mount="Surface Mount", Number of Terminations=2, Packaging="Tape and Reel", Radiation Hardening=No, RoHS Compliant=Yes, Series=RMCF, Width=0.02inch
R33: library part CMP-2002-00251-1, Manufacturer="Vishay Dale", Part Number=CRCW040288K7FKED
R34: library part CMP-2002-08380-2, "RES Thick Film, 22.1kΩ, 1%, 0.063W, 100ppm/°C, 0402", Case Code (Imperial)=0402, Case Code (Metric)=1005, Max Operating Temperature=155°C, Min Operating Temperature=-55°C, Package Quantity=10000, Power Rating=63mW, Resistance=22.1kR, Temperature Coefficient=100ppm/°C, Tolerance=1%, Voltage Rating=50V, Case/Package=0402, Composition="Thick Film", Contact Plating=Tin, Depth=0.5mm, Height=0.35mm, Lead Free="Lead Free", Length=1mm, Military Standard=Not, Mount="Surface Mount", Number of Pins=2, Number of Terminations=2, Packaging="Tape and Reel", Radiation Hardening=No, Termination=SMD/SMT, Voltage Rating (DC)=50V, Weight=2.3E-05oz, Width=0.5mm, Working Voltage=50V